# EAGLE board 14049-TSH82_Configurable_Op_Amp_Board-Panel (EAGLE 9.1.0), part 1 of 8
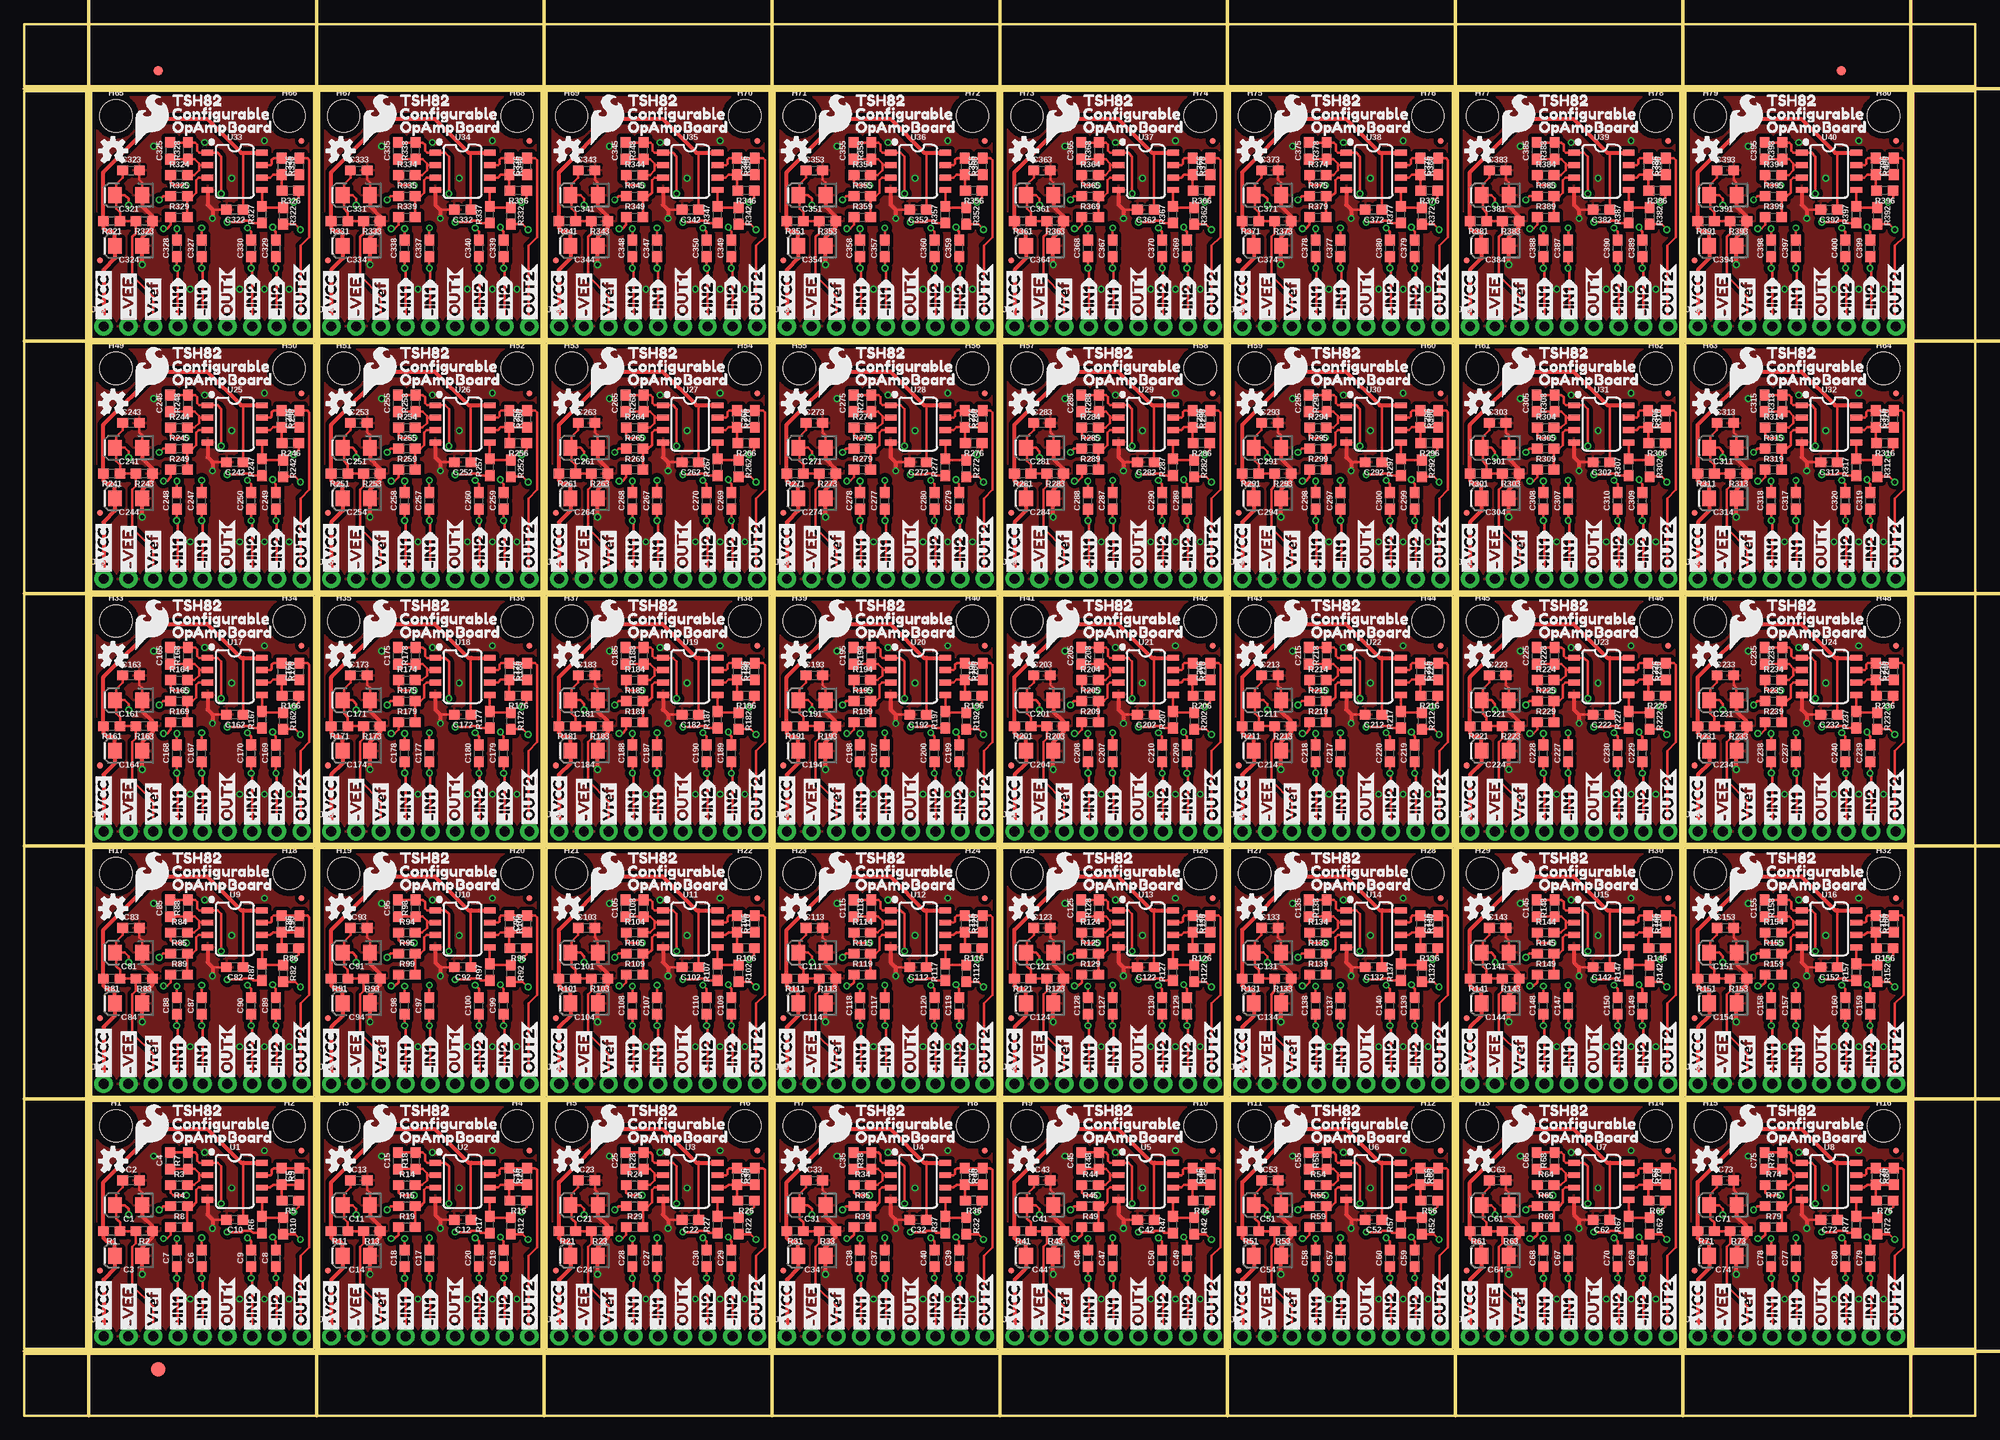
[diagram p0: board, top side]
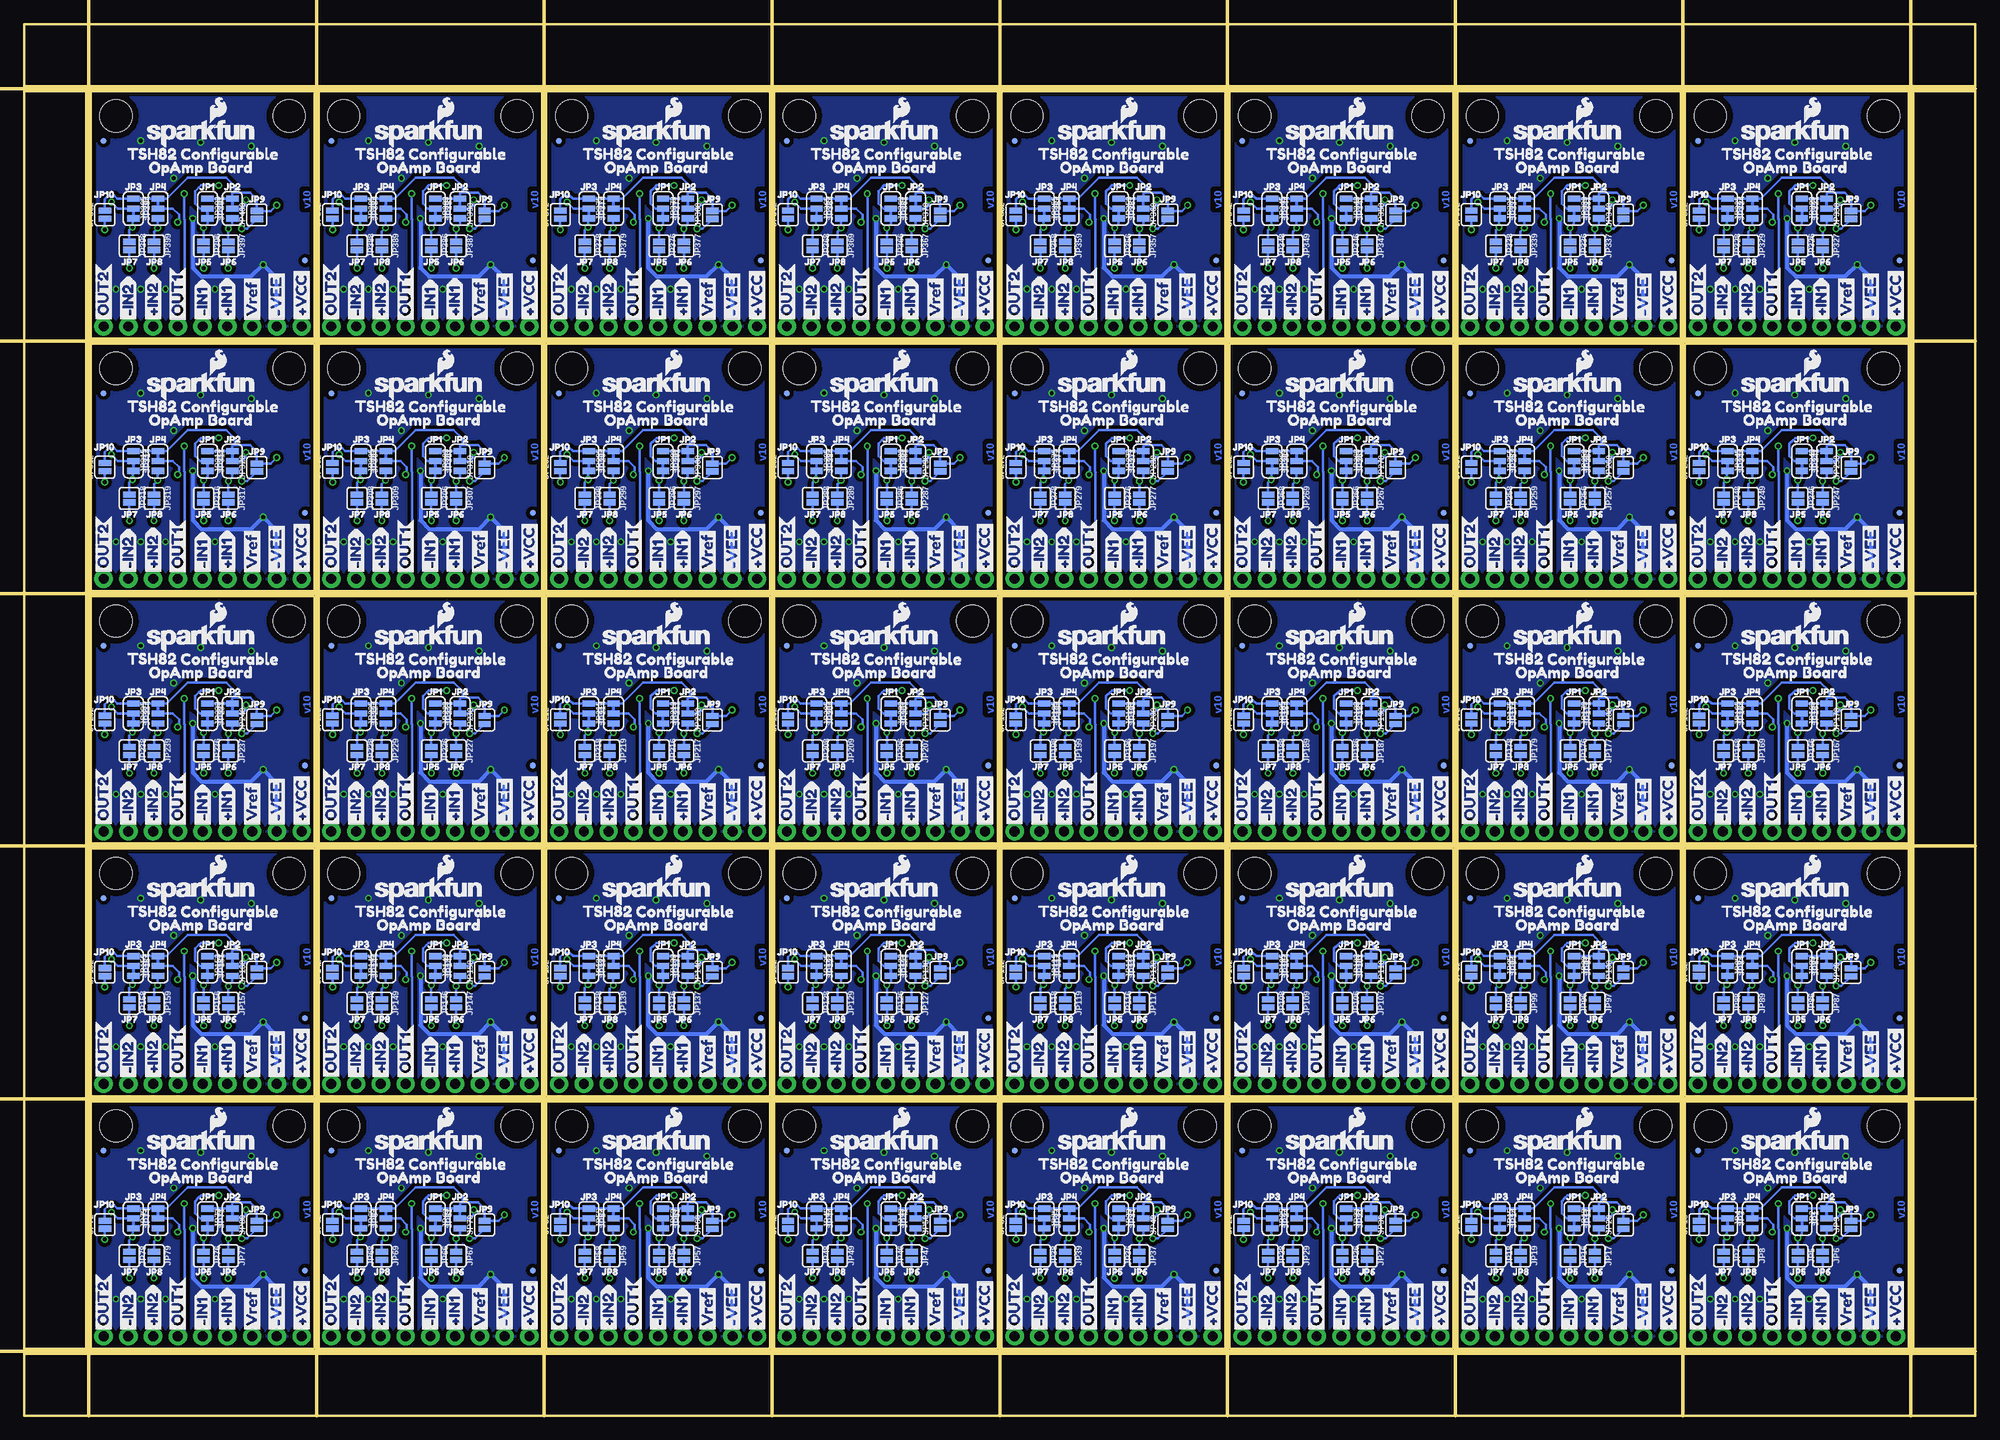
[diagram p1: board, bottom side, seen from below]

Size 200.15 x 142.75 mm. Coordinates in mm from the lower left corner, seen from the top.
Outline: 6.86,6.86 29.72,6.86 29.72,32.26 6.86,32.26 6.86,6.86
Outline: 30.23,6.86 53.09,6.86 53.09,32.26 30.23,32.26 30.23,6.86
Outline: 53.59,6.86 76.45,6.86 76.45,32.26 53.59,32.26 53.59,6.86
Outline: 76.96,6.86 99.82,6.86 99.82,32.26 76.96,32.26 76.96,6.86
Outline: 100.33,6.86 123.19,6.86 123.19,32.26 100.33,32.26 100.33,6.86
Outline: 123.7,6.86 146.56,6.86 146.56,32.26 123.7,32.26 123.7,6.86
Outline: 147.07,6.86 169.93,6.86 169.93,32.26 147.07,32.26 147.07,6.86
Outline: 170.43,6.86 193.29,6.86 193.29,32.26 170.43,32.26 170.43,6.86
Outline: 6.86,32.77 29.72,32.77 29.72,58.17 6.86,58.17 6.86,32.77
Outline: 30.23,32.77 53.09,32.77 53.09,58.17 30.23,58.17 30.23,32.77
Outline: 53.59,32.77 76.45,32.77 76.45,58.17 53.59,58.17 53.59,32.77
Outline: 76.96,32.77 99.82,32.77 99.82,58.17 76.96,58.17 76.96,32.77
Outline: 100.33,32.77 123.19,32.77 123.19,58.17 100.33,58.17 100.33,32.77
Outline: 123.7,32.77 146.56,32.77 146.56,58.17 123.7,58.17 123.7,32.77
Outline: 147.07,32.77 169.93,32.77 169.93,58.17 147.07,58.17 147.07,32.77
Outline: 170.43,32.77 193.29,32.77 193.29,58.17 170.43,58.17 170.43,32.77
Outline: 6.86,58.67 29.72,58.67 29.72,84.07 6.86,84.07 6.86,58.67
Outline: 30.23,58.67 53.09,58.67 53.09,84.07 30.23,84.07 30.23,58.67
Outline: 53.59,58.67 76.45,58.67 76.45,84.07 53.59,84.07 53.59,58.67
Outline: 76.96,58.67 99.82,58.67 99.82,84.07 76.96,84.07 76.96,58.67
Outline: 100.33,58.67 123.19,58.67 123.19,84.07 100.33,84.07 100.33,58.67
Outline: 123.7,58.67 146.56,58.67 146.56,84.07 123.7,84.07 123.7,58.67
Outline: 147.07,58.67 169.93,58.67 169.93,84.07 147.07,84.07 147.07,58.67
Outline: 170.43,58.67 193.29,58.67 193.29,84.07 170.43,84.07 170.43,58.67
Outline: 6.86,84.58 29.72,84.58 29.72,109.98 6.86,109.98 6.86,84.58
Outline: 30.23,84.58 53.09,84.58 53.09,109.98 30.23,109.98 30.23,84.58
Outline: 53.59,84.58 76.45,84.58 76.45,109.98 53.59,109.98 53.59,84.58
Outline: 76.96,84.58 99.82,84.58 99.82,109.98 76.96,109.98 76.96,84.58
Outline: 100.33,84.58 123.19,84.58 123.19,109.98 100.33,109.98 100.33,84.58
Outline: 123.7,84.58 146.56,84.58 146.56,109.98 123.7,109.98 123.7,84.58
Outline: 147.07,84.58 169.93,84.58 169.93,109.98 147.07,109.98 147.07,84.58
Outline: 170.43,84.58 193.29,84.58 193.29,109.98 170.43,109.98 170.43,84.58
Outline: 6.86,110.49 29.72,110.49 29.72,135.89 6.86,135.89 6.86,110.49
Outline: 30.23,110.49 53.09,110.49 53.09,135.89 30.23,135.89 30.23,110.49
Outline: 53.59,110.49 76.45,110.49 76.45,135.89 53.59,135.89 53.59,110.49
Outline: 76.96,110.49 99.82,110.49 99.82,135.89 76.96,135.89 76.96,110.49
Outline: 100.33,110.49 123.19,110.49 123.19,135.89 100.33,135.89 100.33,110.49
Outline: 123.7,110.49 146.56,110.49 146.56,135.89 123.7,135.89 123.7,110.49
Outline: 147.07,110.49 169.93,110.49 169.93,135.89 147.07,135.89 147.07,110.49
Outline: 170.43,110.49 193.29,110.49 193.29,135.89 170.43,135.89 170.43,110.49
Outline: 0,6.35 200.15,6.35 200.15,0 0,0 0,6.35
Outline: 193.8,135.89 200.15,135.89 200.15,6.86 193.8,6.86 193.8,135.89
Outline: 0,142.75 200.15,142.75 200.15,136.4 0,136.4 0,142.75
Outline: 0,135.89 6.35,135.89 6.35,6.86 0,6.86 0,135.89
Copper layers (1*16): Top 0.035mm / dielectric 1.5mm / Bottom 0.035mm
Design rules "SparkFun-2-layer-PCBWay-LIMIT": minimum track width 6mil, minimum drill 0.3mm, track to track 6mil, track to pad 6mil, pad to pad 6mil, via to via 6mil, smd to smd 6mil, copper to edge 6mil, drill to drill 6mil, minimum pad ring 6mil, minimum via ring 6mil, stop-mask expansion 4mil, vias tented up to drill 25mil, thermal gap 10mil
Milling: 15 lines

## Footprints (pad centres in the part's own frame; a part is rotated, then mirrored left to right if it is on the bottom)
EIA3216 = smd 1.4 x 1.6: + 1.4,0; - -1.4,0
0603 = smd 1.1 x 1: 1 -0.85,0; 2 0.85,0
FIDUCIAL-1X2 = smd 1 x 1: 1 0,0
FIDUCIAL-1.5X3 = smd 1.5 x 1.5: 1 0,0
FIDUCIAL-MICRO = smd 0.635 x 0.635: 1 0,0
STAND-OFF = hole 3.302: 0,0
1X09_NO_SILK = drill 1.016 pad 1.88: 1 0,0; 2 2.54,0; 3 5.08,0; 4 7.62,0; 5 10.16,0; 6 12.7,0; 7 15.24,0; 8 17.78,0; 9 20.32,0
SMT-JUMPER_3_1-NC_TRACE_SILK = smd 0.635 x 1.27: 1 -1.016,0; 2 0,0; 3 1.016,0
SMT-JUMPER_2_NO_SILK = smd 0.635 x 1.27: 1 -0.406,0; 2 0.406,0
SO08 = smd 0.6 x 1.2: 1 -1.905,-2.8; 2 -0.635,-2.8; 3 0.635,-2.8; 4 1.905,-2.8; 5 1.905,2.8; 6 0.635,2.8; 7 -0.635,2.8; 8 -1.905,2.8

## Placement (x,y rotation side)
C1  10uF  [EIA3216]  10.69,21.59 180 top
C2  0.1uF  [0603]  10.95,24.13 0 top
C3  10uF  [EIA3216]  10.69,16.38 180 top
C4  DNP  [0603]  14.96,26.14 90 top
C5  DNP  [0603]  28.22,24.54 90 top
C6  1.0uF  [0603]  18.19,16.13 90 top
C7  1.0uF  [0603]  15.65,16.13 90 top
C8  1.0uF  [0603]  25.81,16.13 90 top
C9  1.0uF  [0603]  23.27,16.13 90 top
C10  0.1uF  [0603]  21.59,20.09 180 top
C11  10uF  [EIA3216]  34.06,21.59 180 top
C12  0.1uF  [0603]  44.96,20.09 180 top
C13  0.1uF  [0603]  34.32,24.13 0 top
C14  10uF  [EIA3216]  34.06,16.38 180 top
C15  DNP  [0603]  38.33,26.14 90 top
C16  DNP  [0603]  51.59,24.54 90 top
C17  1.0uF  [0603]  41.55,16.13 90 top
C18  1.0uF  [0603]  39.01,16.13 90 top
C19  1.0uF  [0603]  49.17,16.13 90 top
C20  1.0uF  [0603]  46.63,16.13 90 top
C21  10uF  [EIA3216]  57.43,21.59 180 top
C22  0.1uF  [0603]  68.33,20.09 180 top
C23  0.1uF  [0603]  57.68,24.13 0 top
C24  10uF  [EIA3216]  57.43,16.38 180 top
C25  DNP  [0603]  61.7,26.14 90 top
C26  DNP  [0603]  74.96,24.54 90 top
C27  1.0uF  [0603]  64.92,16.13 90 top
C28  1.0uF  [0603]  62.38,16.13 90 top
C29  1.0uF  [0603]  72.54,16.13 90 top
C30  1.0uF  [0603]  70,16.13 90 top
C31  10uF  [EIA3216]  80.8,21.59 180 top
C32  0.1uF  [0603]  91.69,20.09 180 top
C33  0.1uF  [0603]  81.05,24.13 0 top
C34  10uF  [EIA3216]  80.8,16.38 180 top
C35  DNP  [0603]  85.06,26.14 90 top
C36  DNP  [0603]  98.32,24.54 90 top
C37  1.0uF  [0603]  88.29,16.13 90 top
C38  1.0uF  [0603]  85.75,16.13 90 top
C39  1.0uF  [0603]  95.91,16.13 90 top
C40  1.0uF  [0603]  93.37,16.13 90 top
C41  10uF  [EIA3216]  104.17,21.59 180 top
C42  0.1uF  [0603]  115.06,20.09 180 top
C43  0.1uF  [0603]  104.42,24.13 0 top
C44  10uF  [EIA3216]  104.17,16.38 180 top
C45  DNP  [0603]  108.43,26.14 90 top
C46  DNP  [0603]  121.69,24.54 90 top
C47  1.0uF  [0603]  111.66,16.13 90 top
C48  1.0uF  [0603]  109.12,16.13 90 top
C49  1.0uF  [0603]  119.28,16.13 90 top
C50  1.0uF  [0603]  116.74,16.13 90 top
C51  10uF  [EIA3216]  127.53,21.59 180 top
C52  0.1uF  [0603]  138.43,20.09 180 top
C53  0.1uF  [0603]  127.79,24.13 0 top
C54  10uF  [EIA3216]  127.53,16.38 180 top
C55  DNP  [0603]  131.8,26.14 90 top
C56  DNP  [0603]  145.06,24.54 90 top
C57  1.0uF  [0603]  135.03,16.13 90 top
C58  1.0uF  [0603]  132.49,16.13 90 top
C59  1.0uF  [0603]  142.65,16.13 90 top
C60  1.0uF  [0603]  140.11,16.13 90 top
C61  10uF  [EIA3216]  150.9,21.59 180 top
C62  0.1uF  [0603]  161.8,20.09 180 top
C63  0.1uF  [0603]  151.16,24.13 0 top
C64  10uF  [EIA3216]  150.9,16.38 180 top
C65  DNP  [0603]  155.17,26.14 90 top
C66  DNP  [0603]  168.43,24.54 90 top
C67  1.0uF  [0603]  158.39,16.13 90 top
C68  1.0uF  [0603]  155.85,16.13 90 top
C69  1.0uF  [0603]  166.01,16.13 90 top
C70  1.0uF  [0603]  163.47,16.13 90 top
C71  10uF  [EIA3216]  174.27,21.59 180 top
C72  0.1uF  [0603]  185.17,20.09 180 top
C73  0.1uF  [0603]  174.52,24.13 0 top
C74  10uF  [EIA3216]  174.27,16.38 180 top
C75  DNP  [0603]  178.54,26.14 90 top
C76  DNP  [0603]  191.8,24.54 90 top
C77  1.0uF  [0603]  181.76,16.13 90 top
C78  1.0uF  [0603]  179.22,16.13 90 top
C79  1.0uF  [0603]  189.38,16.13 90 top
C80  1.0uF  [0603]  186.84,16.13 90 top
C81  10uF  [EIA3216]  10.69,47.5 180 top
C82  0.1uF  [0603]  21.59,46 180 top
C83  0.1uF  [0603]  10.95,50.04 0 top
C84  10uF  [EIA3216]  10.69,42.29 180 top
C85  DNP  [0603]  14.96,52.04 90 top
C86  DNP  [0603]  28.22,50.44 90 top
C87  1.0uF  [0603]  18.19,42.04 90 top
C88  1.0uF  [0603]  15.65,42.04 90 top
C89  1.0uF  [0603]  25.81,42.04 90 top
C90  1.0uF  [0603]  23.27,42.04 90 top
C91  10uF  [EIA3216]  34.06,47.5 180 top
C92  0.1uF  [0603]  44.96,46 180 top
C93  0.1uF  [0603]  34.32,50.04 0 top
C94  10uF  [EIA3216]  34.06,42.29 180 top
C95  DNP  [0603]  38.33,52.04 90 top
C96  DNP  [0603]  51.59,50.44 90 top
C97  1.0uF  [0603]  41.55,42.04 90 top
C98  1.0uF  [0603]  39.01,42.04 90 top
C99  1.0uF  [0603]  49.17,42.04 90 top
C100  1.0uF  [0603]  46.63,42.04 90 top
C101  10uF  [EIA3216]  57.43,47.5 180 top
C102  0.1uF  [0603]  68.33,46 180 top
C103  0.1uF  [0603]  57.68,50.04 0 top
C104  10uF  [EIA3216]  57.43,42.29 180 top
C105  DNP  [0603]  61.7,52.04 90 top
C106  DNP  [0603]  74.96,50.44 90 top
C107  1.0uF  [0603]  64.92,42.04 90 top
C108  1.0uF  [0603]  62.38,42.04 90 top
C109  1.0uF  [0603]  72.54,42.04 90 top
C110  1.0uF  [0603]  70,42.04 90 top
C111  10uF  [EIA3216]  80.8,47.5 180 top
C112  0.1uF  [0603]  91.69,46 180 top
C113  0.1uF  [0603]  81.05,50.04 0 top
C114  10uF  [EIA3216]  80.8,42.29 180 top
C115  DNP  [0603]  85.06,52.04 90 top
C116  DNP  [0603]  98.32,50.44 90 top
C117  1.0uF  [0603]  88.29,42.04 90 top
C118  1.0uF  [0603]  85.75,42.04 90 top
C119  1.0uF  [0603]  95.91,42.04 90 top
C120  1.0uF  [0603]  93.37,42.04 90 top
C121  10uF  [EIA3216]  104.17,47.5 180 top
C122  0.1uF  [0603]  115.06,46 180 top
C123  0.1uF  [0603]  104.42,50.04 0 top
C124  10uF  [EIA3216]  104.17,42.29 180 top
C125  DNP  [0603]  108.43,52.04 90 top
C126  DNP  [0603]  121.69,50.44 90 top
C127  1.0uF  [0603]  111.66,42.04 90 top
C128  1.0uF  [0603]  109.12,42.04 90 top
C129  1.0uF  [0603]  119.28,42.04 90 top
C130  1.0uF  [0603]  116.74,42.04 90 top
C131  10uF  [EIA3216]  127.53,47.5 180 top
C132  0.1uF  [0603]  138.43,46 180 top
C133  0.1uF  [0603]  127.79,50.04 0 top
C134  10uF  [EIA3216]  127.53,42.29 180 top
C135  DNP  [0603]  131.8,52.04 90 top
C136  DNP  [0603]  145.06,50.44 90 top
C137  1.0uF  [0603]  135.03,42.04 90 top
C138  1.0uF  [0603]  132.49,42.04 90 top
C139  1.0uF  [0603]  142.65,42.04 90 top
C140  1.0uF  [0603]  140.11,42.04 90 top
C141  10uF  [EIA3216]  150.9,47.5 180 top
C142  0.1uF  [0603]  161.8,46 180 top
C143  0.1uF  [0603]  151.16,50.04 0 top
C144  10uF  [EIA3216]  150.9,42.29 180 top
C145  DNP  [0603]  155.17,52.04 90 top
C146  DNP  [0603]  168.43,50.44 90 top
C147  1.0uF  [0603]  158.39,42.04 90 top
C148  1.0uF  [0603]  155.85,42.04 90 top
C149  1.0uF  [0603]  166.01,42.04 90 top
C150  1.0uF  [0603]  163.47,42.04 90 top
C151  10uF  [EIA3216]  174.27,47.5 180 top
C152  0.1uF  [0603]  185.17,46 180 top
C153  0.1uF  [0603]  174.52,50.04 0 top
C154  10uF  [EIA3216]  174.27,42.29 180 top
C155  DNP  [0603]  178.54,52.04 90 top
C156  DNP  [0603]  191.8,50.44 90 top
C157  1.0uF  [0603]  181.76,42.04 90 top
C158  1.0uF  [0603]  179.22,42.04 90 top
C159  1.0uF  [0603]  189.38,42.04 90 top
C160  1.0uF  [0603]  186.84,42.04 90 top
C161  10uF  [EIA3216]  10.69,73.41 180 top
C162  0.1uF  [0603]  21.59,71.91 180 top
C163  0.1uF  [0603]  10.95,75.95 0 top
C164  10uF  [EIA3216]  10.69,68.2 180 top
C165  DNP  [0603]  14.96,77.95 90 top
C166  DNP  [0603]  28.22,76.35 90 top
C167  1.0uF  [0603]  18.19,67.95 90 top
C168  1.0uF  [0603]  15.65,67.95 90 top
C169  1.0uF  [0603]  25.81,67.95 90 top
C170  1.0uF  [0603]  23.27,67.95 90 top
C171  10uF  [EIA3216]  34.06,73.41 180 top
C172  0.1uF  [0603]  44.96,71.91 180 top
C173  0.1uF  [0603]  34.32,75.95 0 top
C174  10uF  [EIA3216]  34.06,68.2 180 top
C175  DNP  [0603]  38.33,77.95 90 top
C176  DNP  [0603]  51.59,76.35 90 top
C177  1.0uF  [0603]  41.55,67.95 90 top
C178  1.0uF  [0603]  39.01,67.95 90 top
C179  1.0uF  [0603]  49.17,67.95 90 top
C180  1.0uF  [0603]  46.63,67.95 90 top
C181  10uF  [EIA3216]  57.43,73.41 180 top
C182  0.1uF  [0603]  68.33,71.91 180 top
C183  0.1uF  [0603]  57.68,75.95 0 top
C184  10uF  [EIA3216]  57.43,68.2 180 top
C185  DNP  [0603]  61.7,77.95 90 top
C186  DNP  [0603]  74.96,76.35 90 top
C187  1.0uF  [0603]  64.92,67.95 90 top
C188  1.0uF  [0603]  62.38,67.95 90 top
C189  1.0uF  [0603]  72.54,67.95 90 top
C190  1.0uF  [0603]  70,67.95 90 top
C191  10uF  [EIA3216]  80.8,73.41 180 top
C192  0.1uF  [0603]  91.69,71.91 180 top
C193  0.1uF  [0603]  81.05,75.95 0 top
C194  10uF  [EIA3216]  80.8,68.2 180 top
C195  DNP  [0603]  85.06,77.95 90 top
C196  DNP  [0603]  98.32,76.35 90 top
C197  1.0uF  [0603]  88.29,67.95 90 top
C198  1.0uF  [0603]  85.75,67.95 90 top
C199  1.0uF  [0603]  95.91,67.95 90 top
C200  1.0uF  [0603]  93.37,67.95 90 top
C201  10uF  [EIA3216]  104.17,73.41 180 top
C202  0.1uF  [0603]  115.06,71.91 180 top
C203  0.1uF  [0603]  104.42,75.95 0 top
C204  10uF  [EIA3216]  104.17,68.2 180 top
C205  DNP  [0603]  108.43,77.95 90 top
C206  DNP  [0603]  121.69,76.35 90 top
C207  1.0uF  [0603]  111.66,67.95 90 top
C208  1.0uF  [0603]  109.12,67.95 90 top
C209  1.0uF  [0603]  119.28,67.95 90 top
C210  1.0uF  [0603]  116.74,67.95 90 top
C211  10uF  [EIA3216]  127.53,73.41 180 top
C212  0.1uF  [0603]  138.43,71.91 180 top
C213  0.1uF  [0603]  127.79,75.95 0 top
C214  10uF  [EIA3216]  127.53,68.2 180 top
C215  DNP  [0603]  131.8,77.95 90 top
C216  DNP  [0603]  145.06,76.35 90 top
C217  1.0uF  [0603]  135.03,67.95 90 top
C218  1.0uF  [0603]  132.49,67.95 90 top
C219  1.0uF  [0603]  142.65,67.95 90 top
C220  1.0uF  [0603]  140.11,67.95 90 top
C221  10uF  [EIA3216]  150.9,73.41 180 top
C222  0.1uF  [0603]  161.8,71.91 180 top
C223  0.1uF  [0603]  151.16,75.95 0 top
C224  10uF  [EIA3216]  150.9,68.2 180 top
C225  DNP  [0603]  155.17,77.95 90 top
C226  DNP  [0603]  168.43,76.35 90 top
C227  1.0uF  [0603]  158.39,67.95 90 top
C228  1.0uF  [0603]  155.85,67.95 90 top
C229  1.0uF  [0603]  166.01,67.95 90 top
C230  1.0uF  [0603]  163.47,67.95 90 top
C231  10uF  [EIA3216]  174.27,73.41 180 top
C232  0.1uF  [0603]  185.17,71.91 180 top
C233  0.1uF  [0603]  174.52,75.95 0 top
C234  10uF  [EIA3216]  174.27,68.2 180 top
C235  DNP  [0603]  178.54,77.95 90 top
C236  DNP  [0603]  191.8,76.35 90 top
C237  1.0uF  [0603]  181.76,67.95 90 top
C238  1.0uF  [0603]  179.22,67.95 90 top
C239  1.0uF  [0603]  189.38,67.95 90 top
C240  1.0uF  [0603]  186.84,67.95 90 top
C241  10uF  [EIA3216]  10.69,99.31 180 top
C242  0.1uF  [0603]  21.59,97.82 180 top
C243  0.1uF  [0603]  10.95,101.85 0 top
C244  10uF  [EIA3216]  10.69,94.11 180 top
C245  DNP  [0603]  14.96,103.86 90 top
C246  DNP  [0603]  28.22,102.26 90 top
C247  1.0uF  [0603]  18.19,93.85 90 top
C248  1.0uF  [0603]  15.65,93.85 90 top
C249  1.0uF  [0603]  25.81,93.85 90 top
C250  1.0uF  [0603]  23.27,93.85 90 top
C251  10uF  [EIA3216]  34.06,99.31 180 top
C252  0.1uF  [0603]  44.96,97.82 180 top
C253  0.1uF  [0603]  34.32,101.85 0 top
C254  10uF  [EIA3216]  34.06,94.11 180 top
C255  DNP  [0603]  38.33,103.86 90 top
C256  DNP  [0603]  51.59,102.26 90 top
C257  1.0uF  [0603]  41.55,93.85 90 top
C258  1.0uF  [0603]  39.01,93.85 90 top
C259  1.0uF  [0603]  49.17,93.85 90 top
C260  1.0uF  [0603]  46.63,93.85 90 top
C261  10uF  [EIA3216]  57.43,99.31 180 top
C262  0.1uF  [0603]  68.33,97.82 180 top
C263  0.1uF  [0603]  57.68,101.85 0 top
C264  10uF  [EIA3216]  57.43,94.11 180 top
C265  DNP  [0603]  61.7,103.86 90 top
C266  DNP  [0603]  74.96,102.26 90 top
C267  1.0uF  [0603]  64.92,93.85 90 top
C268  1.0uF  [0603]  62.38,93.85 90 top
C269  1.0uF  [0603]  72.54,93.85 90 top
C270  1.0uF  [0603]  70,93.85 90 top
C271  10uF  [EIA3216]  80.8,99.31 180 top
C272  0.1uF  [0603]  91.69,97.82 180 top
C273  0.1uF  [0603]  81.05,101.85 0 top
C274  10uF  [EIA3216]  80.8,94.11 180 top
C275  DNP  [0603]  85.06,103.86 90 top
C276  DNP  [0603]  98.32,102.26 90 top
C277  1.0uF  [0603]  88.29,93.85 90 top
C278  1.0uF  [0603]  85.75,93.85 90 top
C279  1.0uF  [0603]  95.91,93.85 90 top
C280  1.0uF  [0603]  93.37,93.85 90 top
C281  10uF  [EIA3216]  104.17,99.31 180 top
C282  0.1uF  [0603]  115.06,97.82 180 top
C283  0.1uF  [0603]  104.42,101.85 0 top
C284  10uF  [EIA3216]  104.17,94.11 180 top
C285  DNP  [0603]  108.43,103.86 90 top
C286  DNP  [0603]  121.69,102.26 90 top
C287  1.0uF  [0603]  111.66,93.85 90 top
C288  1.0uF  [0603]  109.12,93.85 90 top
C289  1.0uF  [0603]  119.28,93.85 90 top
C290  1.0uF  [0603]  116.74,93.85 90 top
C291  10uF  [EIA3216]  127.53,99.31 180 top
C292  0.1uF  [0603]  138.43,97.82 180 top
C293  0.1uF  [0603]  127.79,101.85 0 top
C294  10uF  [EIA3216]  127.53,94.11 180 top
C295  DNP  [0603]  131.8,103.86 90 top
C296  DNP  [0603]  145.06,102.26 90 top
C297  1.0uF  [0603]  135.03,93.85 90 top
C298  1.0uF  [0603]  132.49,93.85 90 top
C299  1.0uF  [0603]  142.65,93.85 90 top
C300  1.0uF  [0603]  140.11,93.85 90 top
C301  10uF  [EIA3216]  150.9,99.31 180 top
C302  0.1uF  [0603]  161.8,97.82 180 top
C303  0.1uF  [0603]  151.16,101.85 0 top
C304  10uF  [EIA3216]  150.9,94.11 180 top
C305  DNP  [0603]  155.17,103.86 90 top
C306  DNP  [0603]  168.43,102.26 90 top
C307  1.0uF  [0603]  158.39,93.85 90 top
C308  1.0uF  [0603]  155.85,93.85 90 top
C309  1.0uF  [0603]  166.01,93.85 90 top
C310  1.0uF  [0603]  163.47,93.85 90 top
C311  10uF  [EIA3216]  174.27,99.31 180 top
C312  0.1uF  [0603]  185.17,97.82 180 top
C313  0.1uF  [0603]  174.52,101.85 0 top
C314  10uF  [EIA3216]  174.27,94.11 180 top
C315  DNP  [0603]  178.54,103.86 90 top
C316  DNP  [0603]  191.8,102.26 90 top
C317  1.0uF  [0603]  181.76,93.85 90 top
C318  1.0uF  [0603]  179.22,93.85 90 top
C319  1.0uF  [0603]  189.38,93.85 90 top
C320  1.0uF  [0603]  186.84,93.85 90 top
C321  10uF  [EIA3216]  10.69,125.22 180 top
C322  0.1uF  [0603]  21.59,123.72 180 top
C323  0.1uF  [0603]  10.95,127.76 0 top
C324  10uF  [EIA3216]  10.69,120.02 180 top
C325  DNP  [0603]  14.96,129.77 90 top
C326  DNP  [0603]  28.22,128.17 90 top
C327  1.0uF  [0603]  18.19,119.76 90 top
C328  1.0uF  [0603]  15.65,119.76 90 top
C329  1.0uF  [0603]  25.81,119.76 90 top
C330  1.0uF  [0603]  23.27,119.76 90 top
C331  10uF  [EIA3216]  34.06,125.22 180 top
C332  0.1uF  [0603]  44.96,123.72 180 top
C333  0.1uF  [0603]  34.32,127.76 0 top
C334  10uF  [EIA3216]  34.06,120.02 180 top
C335  DNP  [0603]  38.33,129.77 90 top
C336  DNP  [0603]  51.59,128.17 90 top
C337  1.0uF  [0603]  41.55,119.76 90 top
C338  1.0uF  [0603]  39.01,119.76 90 top
C339  1.0uF  [0603]  49.17,119.76 90 top
C340  1.0uF  [0603]  46.63,119.76 90 top
C341  10uF  [EIA3216]  57.43,125.22 180 top
C342  0.1uF  [0603]  68.33,123.72 180 top
C343  0.1uF  [0603]  57.68,127.76 0 top
C344  10uF  [EIA3216]  57.43,120.02 180 top
C345  DNP  [0603]  61.7,129.77 90 top
C346  DNP  [0603]  74.96,128.17 90 top
C347  1.0uF  [0603]  64.92,119.76 90 top
C348  1.0uF  [0603]  62.38,119.76 90 top
C349  1.0uF  [0603]  72.54,119.76 90 top
C350  1.0uF  [0603]  70,119.76 90 top
C351  10uF  [EIA3216]  80.8,125.22 180 top
C352  0.1uF  [0603]  91.69,123.72 180 top
C353  0.1uF  [0603]  81.05,127.76 0 top
C354  10uF  [EIA3216]  80.8,120.02 180 top
C355  DNP  [0603]  85.06,129.77 90 top
C356  DNP  [0603]  98.32,128.17 90 top
C357  1.0uF  [0603]  88.29,119.76 90 top
C358  1.0uF  [0603]  85.75,119.76 90 top
C359  1.0uF  [0603]  95.91,119.76 90 top
C360  1.0uF  [0603]  93.37,119.76 90 top
C361  10uF  [EIA3216]  104.17,125.22 180 top
C362  0.1uF  [0603]  115.06,123.72 180 top
C363  0.1uF  [0603]  104.42,127.76 0 top
C364  10uF  [EIA3216]  104.17,120.02 180 top
C365  DNP  [0603]  108.43,129.77 90 top
C366  DNP  [0603]  121.69,128.17 90 top
C367  1.0uF  [0603]  111.66,119.76 90 top
C368  1.0uF  [0603]  109.12,119.76 90 top
C369  1.0uF  [0603]  119.28,119.76 90 top
C370  1.0uF  [0603]  116.74,119.76 90 top
C371  10uF  [EIA3216]  127.53,125.22 180 top
C372  0.1uF  [0603]  138.43,123.72 180 top
C373  0.1uF  [0603]  127.79,127.76 0 top
C374  10uF  [EIA3216]  127.53,120.02 180 top
C375  DNP  [0603]  131.8,129.77 90 top
C376  DNP  [0603]  145.06,128.17 90 top
C377  1.0uF  [0603]  135.03,119.76 90 top
C378  1.0uF  [0603]  132.49,119.76 90 top
C379  1.0uF  [0603]  142.65,119.76 90 top
C380  1.0uF  [0603]  140.11,119.76 90 top
C381  10uF  [EIA3216]  150.9,125.22 180 top
C382  0.1uF  [0603]  161.8,123.72 180 top
C383  0.1uF  [0603]  151.16,127.76 0 top
C384  10uF  [EIA3216]  150.9,120.02 180 top
C385  DNP  [0603]  155.17,129.77 90 top
C386  DNP  [0603]  168.43,128.17 90 top
C387  1.0uF  [0603]  158.39,119.76 90 top
C388  1.0uF  [0603]  155.85,119.76 90 top
C389  1.0uF  [0603]  166.01,119.76 90 top
C390  1.0uF  [0603]  163.47,119.76 90 top
C391  10uF  [EIA3216]  174.27,125.22 180 top
C392  0.1uF  [0603]  185.17,123.72 180 top
C393  0.1uF  [0603]  174.52,127.76 0 top
C394  10uF  [EIA3216]  174.27,120.02 180 top
C395  DNP  [0603]  178.54,129.77 90 top
C396  DNP  [0603]  191.8,128.17 90 top
C397  1.0uF  [0603]  181.76,119.76 90 top
C398  1.0uF  [0603]  179.22,119.76 90 top
C399  1.0uF  [0603]  189.38,119.76 90 top
C400  1.0uF  [0603]  186.84,119.76 90 top
E$1  [FIDUCIAL-1X2]  13.72,137.99 0 top
E$2  [FIDUCIAL-1X2]  186.44,137.99 0 top
E$3  [FIDUCIAL-1.5X3]  13.72,4.76 0 top
FD1  FIDUCIALUFIDUCIAL  [FIDUCIAL-MICRO]  28.45,27.18 0 top
FD2  FIDUCIALUFIDUCIAL  [FIDUCIAL-MICRO]  7.77,14.88 0 top
FD3  FIDUCIALUFIDUCIAL  [FIDUCIAL-MICRO]  7.77,14.88 0 bottom
FD4  FIDUCIALUFIDUCIAL  [FIDUCIAL-MICRO]  28.45,27.18 0 bottom
FD5  FIDUCIALUFIDUCIAL  [FIDUCIAL-MICRO]  51.82,27.18 0 top
FD6  FIDUCIALUFIDUCIAL  [FIDUCIAL-MICRO]  31.14,14.88 0 top
FD7  FIDUCIALUFIDUCIAL  [FIDUCIAL-MICRO]  31.14,14.88 0 bottom
FD8  FIDUCIALUFIDUCIAL  [FIDUCIAL-MICRO]  51.82,27.18 0 bottom
FD9  FIDUCIALUFIDUCIAL  [FIDUCIAL-MICRO]  75.18,27.18 0 top
FD10  FIDUCIALUFIDUCIAL  [FIDUCIAL-MICRO]  54.51,14.88 0 top
FD11  FIDUCIALUFIDUCIAL  [FIDUCIAL-MICRO]  54.51,14.88 0 bottom
FD12  FIDUCIALUFIDUCIAL  [FIDUCIAL-MICRO]  75.18,27.18 0 bottom
FD13  FIDUCIALUFIDUCIAL  [FIDUCIAL-MICRO]  98.55,27.18 0 top
FD14  FIDUCIALUFIDUCIAL  [FIDUCIAL-MICRO]  77.88,14.88 0 top
FD15  FIDUCIALUFIDUCIAL  [FIDUCIAL-MICRO]  77.88,14.88 0 bottom
FD16  FIDUCIALUFIDUCIAL  [FIDUCIAL-MICRO]  98.55,27.18 0 bottom
FD17  FIDUCIALUFIDUCIAL  [FIDUCIAL-MICRO]  121.92,27.18 0 top
FD18  FIDUCIALUFIDUCIAL  [FIDUCIAL-MICRO]  101.24,14.88 0 top
FD19  FIDUCIALUFIDUCIAL  [FIDUCIAL-MICRO]  101.24,14.88 0 bottom
FD20  FIDUCIALUFIDUCIAL  [FIDUCIAL-MICRO]  121.92,27.18 0 bottom
FD21  FIDUCIALUFIDUCIAL  [FIDUCIAL-MICRO]  145.29,27.18 0 top
FD22  FIDUCIALUFIDUCIAL  [FIDUCIAL-MICRO]  124.61,14.88 0 top
FD23  FIDUCIALUFIDUCIAL  [FIDUCIAL-MICRO]  124.61,14.88 0 bottom
FD24  FIDUCIALUFIDUCIAL  [FIDUCIAL-MICRO]  145.29,27.18 0 bottom
FD25  FIDUCIALUFIDUCIAL  [FIDUCIAL-MICRO]  168.66,27.18 0 top
FD26  FIDUCIALUFIDUCIAL  [FIDUCIAL-MICRO]  147.98,14.88 0 top
FD27  FIDUCIALUFIDUCIAL  [FIDUCIAL-MICRO]  147.98,14.88 0 bottom
FD28  FIDUCIALUFIDUCIAL  [FIDUCIAL-MICRO]  168.66,27.18 0 bottom
FD29  FIDUCIALUFIDUCIAL  [FIDUCIAL-MICRO]  192.02,27.18 0 top
FD30  FIDUCIALUFIDUCIAL  [FIDUCIAL-MICRO]  171.35,14.88 0 top
FD31  FIDUCIALUFIDUCIAL  [FIDUCIAL-MICRO]  171.35,14.88 0 bottom
FD32  FIDUCIALUFIDUCIAL  [FIDUCIAL-MICRO]  192.02,27.18 0 bottom
FD33  FIDUCIALUFIDUCIAL  [FIDUCIAL-MICRO]  28.45,53.09 0 top
FD34  FIDUCIALUFIDUCIAL  [FIDUCIAL-MICRO]  7.77,40.79 0 top
FD35  FIDUCIALUFIDUCIAL  [FIDUCIAL-MICRO]  7.77,40.79 0 bottom
FD36  FIDUCIALUFIDUCIAL  [FIDUCIAL-MICRO]  28.45,53.09 0 bottom
FD37  FIDUCIALUFIDUCIAL  [FIDUCIAL-MICRO]  51.82,53.09 0 top
FD38  FIDUCIALUFIDUCIAL  [FIDUCIAL-MICRO]  31.14,40.79 0 top
FD39  FIDUCIALUFIDUCIAL  [FIDUCIAL-MICRO]  31.14,40.79 0 bottom
FD40  FIDUCIALUFIDUCIAL  [FIDUCIAL-MICRO]  51.82,53.09 0 bottom
FD41  FIDUCIALUFIDUCIAL  [FIDUCIAL-MICRO]  75.18,53.09 0 top
FD42  FIDUCIALUFIDUCIAL  [FIDUCIAL-MICRO]  54.51,40.79 0 top
FD43  FIDUCIALUFIDUCIAL  [FIDUCIAL-MICRO]  54.51,40.79 0 bottom
FD44  FIDUCIALUFIDUCIAL  [FIDUCIAL-MICRO]  75.18,53.09 0 bottom
FD45  FIDUCIALUFIDUCIAL  [FIDUCIAL-MICRO]  98.55,53.09 0 top
FD46  FIDUCIALUFIDUCIAL  [FIDUCIAL-MICRO]  77.88,40.79 0 top
FD47  FIDUCIALUFIDUCIAL  [FIDUCIAL-MICRO]  77.88,40.79 0 bottom
FD48  FIDUCIALUFIDUCIAL  [FIDUCIAL-MICRO]  98.55,53.09 0 bottom
FD49  FIDUCIALUFIDUCIAL  [FIDUCIAL-MICRO]  121.92,53.09 0 top
FD50  FIDUCIALUFIDUCIAL  [FIDUCIAL-MICRO]  101.24,40.79 0 top
FD51  FIDUCIALUFIDUCIAL  [FIDUCIAL-MICRO]  101.24,40.79 0 bottom
FD52  FIDUCIALUFIDUCIAL  [FIDUCIAL-MICRO]  121.92,53.09 0 bottom
FD53  FIDUCIALUFIDUCIAL  [FIDUCIAL-MICRO]  145.29,53.09 0 top
FD54  FIDUCIALUFIDUCIAL  [FIDUCIAL-MICRO]  124.61,40.79 0 top
FD55  FIDUCIALUFIDUCIAL  [FIDUCIAL-MICRO]  124.61,40.79 0 bottom
FD56  FIDUCIALUFIDUCIAL  [FIDUCIAL-MICRO]  145.29,53.09 0 bottom
FD57  FIDUCIALUFIDUCIAL  [FIDUCIAL-MICRO]  168.66,53.09 0 top
FD58  FIDUCIALUFIDUCIAL  [FIDUCIAL-MICRO]  147.98,40.79 0 top
FD59  FIDUCIALUFIDUCIAL  [FIDUCIAL-MICRO]  147.98,40.79 0 bottom
FD60  FIDUCIALUFIDUCIAL  [FIDUCIAL-MICRO]  168.66,53.09 0 bottom
FD61  FIDUCIALUFIDUCIAL  [FIDUCIAL-MICRO]  192.02,53.09 0 top
FD62  FIDUCIALUFIDUCIAL  [FIDUCIAL-MICRO]  171.35,40.79 0 top
FD63  FIDUCIALUFIDUCIAL  [FIDUCIAL-MICRO]  171.35,40.79 0 bottom
FD64  FIDUCIALUFIDUCIAL  [FIDUCIAL-MICRO]  192.02,53.09 0 bottom
FD65  FIDUCIALUFIDUCIAL  [FIDUCIAL-MICRO]  28.45,78.99 0 top
FD66  FIDUCIALUFIDUCIAL  [FIDUCIAL-MICRO]  7.77,66.7 0 top
FD67  FIDUCIALUFIDUCIAL  [FIDUCIAL-MICRO]  7.77,66.7 0 bottom
FD68  FIDUCIALUFIDUCIAL  [FIDUCIAL-MICRO]  28.45,78.99 0 bottom
FD69  FIDUCIALUFIDUCIAL  [FIDUCIAL-MICRO]  51.82,78.99 0 top
FD70  FIDUCIALUFIDUCIAL  [FIDUCIAL-MICRO]  31.14,66.7 0 top
FD71  FIDUCIALUFIDUCIAL  [FIDUCIAL-MICRO]  31.14,66.7 0 bottom
FD72  FIDUCIALUFIDUCIAL  [FIDUCIAL-MICRO]  51.82,78.99 0 bottom
FD73  FIDUCIALUFIDUCIAL  [FIDUCIAL-MICRO]  75.18,78.99 0 top
FD74  FIDUCIALUFIDUCIAL  [FIDUCIAL-MICRO]  54.51,66.7 0 top
FD75  FIDUCIALUFIDUCIAL  [FIDUCIAL-MICRO]  54.51,66.7 0 bottom
FD76  FIDUCIALUFIDUCIAL  [FIDUCIAL-MICRO]  75.18,78.99 0 bottom
FD77  FIDUCIALUFIDUCIAL  [FIDUCIAL-MICRO]  98.55,78.99 0 top
FD78  FIDUCIALUFIDUCIAL  [FIDUCIAL-MICRO]  77.88,66.7 0 top
FD79  FIDUCIALUFIDUCIAL  [FIDUCIAL-MICRO]  77.88,66.7 0 bottom
FD80  FIDUCIALUFIDUCIAL  [FIDUCIAL-MICRO]  98.55,78.99 0 bottom
FD81  FIDUCIALUFIDUCIAL  [FIDUCIAL-MICRO]  121.92,78.99 0 top
FD82  FIDUCIALUFIDUCIAL  [FIDUCIAL-MICRO]  101.24,66.7 0 top
FD83  FIDUCIALUFIDUCIAL  [FIDUCIAL-MICRO]  101.24,66.7 0 bottom
FD84  FIDUCIALUFIDUCIAL  [FIDUCIAL-MICRO]  121.92,78.99 0 bottom
FD85  FIDUCIALUFIDUCIAL  [FIDUCIAL-MICRO]  145.29,78.99 0 top
FD86  FIDUCIALUFIDUCIAL  [FIDUCIAL-MICRO]  124.61,66.7 0 top
FD87  FIDUCIALUFIDUCIAL  [FIDUCIAL-MICRO]  124.61,66.7 0 bottom
FD88  FIDUCIALUFIDUCIAL  [FIDUCIAL-MICRO]  145.29,78.99 0 bottom
FD89  FIDUCIALUFIDUCIAL  [FIDUCIAL-MICRO]  168.66,78.99 0 top
FD90  FIDUCIALUFIDUCIAL  [FIDUCIAL-MICRO]  147.98,66.7 0 top
FD91  FIDUCIALUFIDUCIAL  [FIDUCIAL-MICRO]  147.98,66.7 0 bottom
FD92  FIDUCIALUFIDUCIAL  [FIDUCIAL-MICRO]  168.66,78.99 0 bottom
FD93  FIDUCIALUFIDUCIAL  [FIDUCIAL-MICRO]  192.02,78.99 0 top
FD94  FIDUCIALUFIDUCIAL  [FIDUCIAL-MICRO]  171.35,66.7 0 top
FD95  FIDUCIALUFIDUCIAL  [FIDUCIAL-MICRO]  171.35,66.7 0 bottom
FD96  FIDUCIALUFIDUCIAL  [FIDUCIAL-MICRO]  192.02,78.99 0 bottom
FD97  FIDUCIALUFIDUCIAL  [FIDUCIAL-MICRO]  28.45,104.9 0 top
FD98  FIDUCIALUFIDUCIAL  [FIDUCIAL-MICRO]  7.77,92.61 0 top
FD99  FIDUCIALUFIDUCIAL  [FIDUCIAL-MICRO]  7.77,92.61 0 bottom
FD100  FIDUCIALUFIDUCIAL  [FIDUCIAL-MICRO]  28.45,104.9 0 bottom
FD101  FIDUCIALUFIDUCIAL  [FIDUCIAL-MICRO]  51.82,104.9 0 top
FD102  FIDUCIALUFIDUCIAL  [FIDUCIAL-MICRO]  31.14,92.61 0 top
FD103  FIDUCIALUFIDUCIAL  [FIDUCIAL-MICRO]  31.14,92.61 0 bottom
FD104  FIDUCIALUFIDUCIAL  [FIDUCIAL-MICRO]  51.82,104.9 0 bottom
FD105  FIDUCIALUFIDUCIAL  [FIDUCIAL-MICRO]  75.18,104.9 0 top
FD106  FIDUCIALUFIDUCIAL  [FIDUCIAL-MICRO]  54.51,92.61 0 top
FD107  FIDUCIALUFIDUCIAL  [FIDUCIAL-MICRO]  54.51,92.61 0 bottom
FD108  FIDUCIALUFIDUCIAL  [FIDUCIAL-MICRO]  75.18,104.9 0 bottom
FD109  FIDUCIALUFIDUCIAL  [FIDUCIAL-MICRO]  98.55,104.9 0 top
FD110  FIDUCIALUFIDUCIAL  [FIDUCIAL-MICRO]  77.88,92.61 0 top
FD111  FIDUCIALUFIDUCIAL  [FIDUCIAL-MICRO]  77.88,92.61 0 bottom
FD112  FIDUCIALUFIDUCIAL  [FIDUCIAL-MICRO]  98.55,104.9 0 bottom
FD113  FIDUCIALUFIDUCIAL  [FIDUCIAL-MICRO]  121.92,104.9 0 top
FD114  FIDUCIALUFIDUCIAL  [FIDUCIAL-MICRO]  101.24,92.61 0 top
FD115  FIDUCIALUFIDUCIAL  [FIDUCIAL-MICRO]  101.24,92.61 0 bottom
FD116  FIDUCIALUFIDUCIAL  [FIDUCIAL-MICRO]  121.92,104.9 0 bottom
FD117  FIDUCIALUFIDUCIAL  [FIDUCIAL-MICRO]  145.29,104.9 0 top
FD118  FIDUCIALUFIDUCIAL  [FIDUCIAL-MICRO]  124.61,92.61 0 top
FD119  FIDUCIALUFIDUCIAL  [FIDUCIAL-MICRO]  124.61,92.61 0 bottom
FD120  FIDUCIALUFIDUCIAL  [FIDUCIAL-MICRO]  145.29,104.9 0 bottom
FD121  FIDUCIALUFIDUCIAL  [FIDUCIAL-MICRO]  168.66,104.9 0 top
FD122  FIDUCIALUFIDUCIAL  [FIDUCIAL-MICRO]  147.98,92.61 0 top
FD123  FIDUCIALUFIDUCIAL  [FIDUCIAL-MICRO]  147.98,92.61 0 bottom
FD124  FIDUCIALUFIDUCIAL  [FIDUCIAL-MICRO]  168.66,104.9 0 bottom
FD125  FIDUCIALUFIDUCIAL  [FIDUCIAL-MICRO]  192.02,104.9 0 top
FD126  FIDUCIALUFIDUCIAL  [FIDUCIAL-MICRO]  171.35,92.61 0 top
FD127  FIDUCIALUFIDUCIAL  [FIDUCIAL-MICRO]  171.35,92.61 0 bottom
FD128  FIDUCIALUFIDUCIAL  [FIDUCIAL-MICRO]  192.02,104.9 0 bottom
FD129  FIDUCIALUFIDUCIAL  [FIDUCIAL-MICRO]  28.45,130.81 0 top
FD130  FIDUCIALUFIDUCIAL  [FIDUCIAL-MICRO]  7.77,118.52 0 top
FD131  FIDUCIALUFIDUCIAL  [FIDUCIAL-MICRO]  7.77,118.52 0 bottom
FD132  FIDUCIALUFIDUCIAL  [FIDUCIAL-MICRO]  28.45,130.81 0 bottom
FD133  FIDUCIALUFIDUCIAL  [FIDUCIAL-MICRO]  51.82,130.81 0 top
FD134  FIDUCIALUFIDUCIAL  [FIDUCIAL-MICRO]  31.14,118.52 0 top
FD135  FIDUCIALUFIDUCIAL  [FIDUCIAL-MICRO]  31.14,118.52 0 bottom
FD136  FIDUCIALUFIDUCIAL  [FIDUCIAL-MICRO]  51.82,130.81 0 bottom
FD137  FIDUCIALUFIDUCIAL  [FIDUCIAL-MICRO]  75.18,130.81 0 top
FD138  FIDUCIALUFIDUCIAL  [FIDUCIAL-MICRO]  54.51,118.52 0 top
FD139  FIDUCIALUFIDUCIAL  [FIDUCIAL-MICRO]  54.51,118.52 0 bottom
FD140  FIDUCIALUFIDUCIAL  [FIDUCIAL-MICRO]  75.18,130.81 0 bottom
FD141  FIDUCIALUFIDUCIAL  [FIDUCIAL-MICRO]  98.55,130.81 0 top
FD142  FIDUCIALUFIDUCIAL  [FIDUCIAL-MICRO]  77.88,118.52 0 top
FD143  FIDUCIALUFIDUCIAL  [FIDUCIAL-MICRO]  77.88,118.52 0 bottom
FD144  FIDUCIALUFIDUCIAL  [FIDUCIAL-MICRO]  98.55,130.81 0 bottom
FD145  FIDUCIALUFIDUCIAL  [FIDUCIAL-MICRO]  121.92,130.81 0 top
FD146  FIDUCIALUFIDUCIAL  [FIDUCIAL-MICRO]  101.24,118.52 0 top
FD147  FIDUCIALUFIDUCIAL  [FIDUCIAL-MICRO]  101.24,118.52 0 bottom
FD148  FIDUCIALUFIDUCIAL  [FIDUCIAL-MICRO]  121.92,130.81 0 bottom
FD149  FIDUCIALUFIDUCIAL  [FIDUCIAL-MICRO]  145.29,130.81 0 top
FD150  FIDUCIALUFIDUCIAL  [FIDUCIAL-MICRO]  124.61,118.52 0 top
FD151  FIDUCIALUFIDUCIAL  [FIDUCIAL-MICRO]  124.61,118.52 0 bottom
FD152  FIDUCIALUFIDUCIAL  [FIDUCIAL-MICRO]  145.29,130.81 0 bottom
FD153  FIDUCIALUFIDUCIAL  [FIDUCIAL-MICRO]  168.66,130.81 0 top
FD154  FIDUCIALUFIDUCIAL  [FIDUCIAL-MICRO]  147.98,118.52 0 top
FD155  FIDUCIALUFIDUCIAL  [FIDUCIAL-MICRO]  147.98,118.52 0 bottom
FD156  FIDUCIALUFIDUCIAL  [FIDUCIAL-MICRO]  168.66,130.81 0 bottom
FD157  FIDUCIALUFIDUCIAL  [FIDUCIAL-MICRO]  192.02,130.81 0 top
FD158  FIDUCIALUFIDUCIAL  [FIDUCIAL-MICRO]  171.35,118.52 0 top
FD159  FIDUCIALUFIDUCIAL  [FIDUCIAL-MICRO]  171.35,118.52 0 bottom
FD160  FIDUCIALUFIDUCIAL  [FIDUCIAL-MICRO]  192.02,130.81 0 bottom
H1  STAND-OFF  [STAND-OFF]  9.4,29.72 0 top
H2  STAND-OFF  [STAND-OFF]  27.18,29.72 0 top
H3  STAND-OFF  [STAND-OFF]  32.77,29.72 0 top
H4  STAND-OFF  [STAND-OFF]  50.55,29.72 0 top
H5  STAND-OFF  [STAND-OFF]  56.13,29.72 0 top
H6  STAND-OFF  [STAND-OFF]  73.91,29.72 0 top
H7  STAND-OFF  [STAND-OFF]  79.5,29.72 0 top
H8  STAND-OFF  [STAND-OFF]  97.28,29.72 0 top
H9  STAND-OFF  [STAND-OFF]  102.87,29.72 0 top
H10  STAND-OFF  [STAND-OFF]  120.65,29.72 0 top
H11  STAND-OFF  [STAND-OFF]  126.24,29.72 0 top
H12  STAND-OFF  [STAND-OFF]  144.02,29.72 0 top
H13  STAND-OFF  [STAND-OFF]  149.61,29.72 0 top
H14  STAND-OFF  [STAND-OFF]  167.39,29.72 0 top
H15  STAND-OFF  [STAND-OFF]  172.97,29.72 0 top
H16  STAND-OFF  [STAND-OFF]  190.75,29.72 0 top
H17  STAND-OFF  [STAND-OFF]  9.4,55.63 0 top
H18  STAND-OFF  [STAND-OFF]  27.18,55.63 0 top
H19  STAND-OFF  [STAND-OFF]  32.77,55.63 0 top
H20  STAND-OFF  [STAND-OFF]  50.55,55.63 0 top
H21  STAND-OFF  [STAND-OFF]  56.13,55.63 0 top
H22  STAND-OFF  [STAND-OFF]  73.91,55.63 0 top
H23  STAND-OFF  [STAND-OFF]  79.5,55.63 0 top
H24  STAND-OFF  [STAND-OFF]  97.28,55.63 0 top
H25  STAND-OFF  [STAND-OFF]  102.87,55.63 0 top
H26  STAND-OFF  [STAND-OFF]  120.65,55.63 0 top
H27  STAND-OFF  [STAND-OFF]  126.24,55.63 0 top
H28  STAND-OFF  [STAND-OFF]  144.02,55.63 0 top
H29  STAND-OFF  [STAND-OFF]  149.61,55.63 0 top
H30  STAND-OFF  [STAND-OFF]  167.39,55.63 0 top
H31  STAND-OFF  [STAND-OFF]  172.97,55.63 0 top
H32  STAND-OFF  [STAND-OFF]  190.75,55.63 0 top
H33  STAND-OFF  [STAND-OFF]  9.4,81.53 0 top
H34  STAND-OFF  [STAND-OFF]  27.18,81.53 0 top
H35  STAND-OFF  [STAND-OFF]  32.77,81.53 0 top
H36  STAND-OFF  [STAND-OFF]  50.55,81.53 0 top
H37  STAND-OFF  [STAND-OFF]  56.13,81.53 0 top
H38  STAND-OFF  [STAND-OFF]  73.91,81.53 0 top
H39  STAND-OFF  [STAND-OFF]  79.5,81.53 0 top
H40  STAND-OFF  [STAND-OFF]  97.28,81.53 0 top
H41  STAND-OFF  [STAND-OFF]  102.87,81.53 0 top
H42  STAND-OFF  [STAND-OFF]  120.65,81.53 0 top
H43  STAND-OFF  [STAND-OFF]  126.24,81.53 0 top
H44  STAND-OFF  [STAND-OFF]  144.02,81.53 0 top
H45  STAND-OFF  [STAND-OFF]  149.61,81.53 0 top
H46  STAND-OFF  [STAND-OFF]  167.39,81.53 0 top
H47  STAND-OFF  [STAND-OFF]  172.97,81.53 0 top
H48  STAND-OFF  [STAND-OFF]  190.75,81.53 0 top
H49  STAND-OFF  [STAND-OFF]  9.4,107.44 0 top
H50  STAND-OFF  [STAND-OFF]  27.18,107.44 0 top
H51  STAND-OFF  [STAND-OFF]  32.77,107.44 0 top
H52  STAND-OFF  [STAND-OFF]  50.55,107.44 0 top
H53  STAND-OFF  [STAND-OFF]  56.13,107.44 0 top
H54  STAND-OFF  [STAND-OFF]  73.91,107.44 0 top
H55  STAND-OFF  [STAND-OFF]  79.5,107.44 0 top
H56  STAND-OFF  [STAND-OFF]  97.28,107.44 0 top
H57  STAND-OFF  [STAND-OFF]  102.87,107.44 0 top
H58  STAND-OFF  [STAND-OFF]  120.65,107.44 0 top
H59  STAND-OFF  [STAND-OFF]  126.24,107.44 0 top
H60  STAND-OFF  [STAND-OFF]  144.02,107.44 0 top
H61  STAND-OFF  [STAND-OFF]  149.61,107.44 0 top
H62  STAND-OFF  [STAND-OFF]  167.39,107.44 0 top
H63  STAND-OFF  [STAND-OFF]  172.97,107.44 0 top
H64  STAND-OFF  [STAND-OFF]  190.75,107.44 0 top
H65  STAND-OFF  [STAND-OFF]  9.4,133.35 0 top
H66  STAND-OFF  [STAND-OFF]  27.18,133.35 0 top
H67  STAND-OFF  [STAND-OFF]  32.77,133.35 0 top
H68  STAND-OFF  [STAND-OFF]  50.55,133.35 0 top
H69  STAND-OFF  [STAND-OFF]  56.13,133.35 0 top
H70  STAND-OFF  [STAND-OFF]  73.91,133.35 0 top
H71  STAND-OFF  [STAND-OFF]  79.5,133.35 0 top
H72  STAND-OFF  [STAND-OFF]  97.28,133.35 0 top
H73  STAND-OFF  [STAND-OFF]  102.87,133.35 0 top
H74  STAND-OFF  [STAND-OFF]  120.65,133.35 0 top
H75  STAND-OFF  [STAND-OFF]  126.24,133.35 0 top
H76  STAND-OFF  [STAND-OFF]  144.02,133.35 0 top
H77  STAND-OFF  [STAND-OFF]  149.61,133.35 0 top
H78  STAND-OFF  [STAND-OFF]  167.39,133.35 0 top
H79  STAND-OFF  [STAND-OFF]  172.97,133.35 0 top
H80  STAND-OFF  [STAND-OFF]  190.75,133.35 0 top
J1  [1X09_NO_SILK]  8.13,8.13 0 top
J2  [1X09_NO_SILK]  31.5,8.13 0 top
J3  [1X09_NO_SILK]  54.86,8.13 0 top
J4  [1X09_NO_SILK]  78.23,8.13 0 top
J5  [1X09_NO_SILK]  101.6,8.13 0 top
J6  [1X09_NO_SILK]  124.97,8.13 0 top
J7  [1X09_NO_SILK]  148.34,8.13 0 top
J8  [1X09_NO_SILK]  171.7,8.13 0 top
J9  [1X09_NO_SILK]  8.13,34.04 0 top
J10  [1X09_NO_SILK]  31.5,34.04 0 top
J11  [1X09_NO_SILK]  54.86,34.04 0 top
J12  [1X09_NO_SILK]  78.23,34.04 0 top
J13  [1X09_NO_SILK]  101.6,34.04 0 top
J14  [1X09_NO_SILK]  124.97,34.04 0 top
J15  [1X09_NO_SILK]  148.34,34.04 0 top
J16  [1X09_NO_SILK]  171.7,34.04 0 top
J17  [1X09_NO_SILK]  8.13,59.94 0 top
J18  [1X09_NO_SILK]  31.5,59.94 0 top
J19  [1X09_NO_SILK]  54.86,59.94 0 top
J20  [1X09_NO_SILK]  78.23,59.94 0 top
J21  [1X09_NO_SILK]  101.6,59.94 0 top
J22  [1X09_NO_SILK]  124.97,59.94 0 top
J23  [1X09_NO_SILK]  148.34,59.94 0 top
J24  [1X09_NO_SILK]  171.7,59.94 0 top
J25  [1X09_NO_SILK]  8.13,85.85 0 top
J26  [1X09_NO_SILK]  31.5,85.85 0 top
J27  [1X09_NO_SILK]  54.86,85.85 0 top
J28  [1X09_NO_SILK]  78.23,85.85 0 top
J29  [1X09_NO_SILK]  101.6,85.85 0 top
J30  [1X09_NO_SILK]  124.97,85.85 0 top
J31  [1X09_NO_SILK]  148.34,85.85 0 top
J32  [1X09_NO_SILK]  171.7,85.85 0 top
J33  [1X09_NO_SILK]  8.13,111.76 0 top
J34  [1X09_NO_SILK]  31.5,111.76 0 top
J35  [1X09_NO_SILK]  54.86,111.76 0 top
J36  [1X09_NO_SILK]  78.23,111.76 0 top
J37  [1X09_NO_SILK]  101.6,111.76 0 top
J38  [1X09_NO_SILK]  124.97,111.76 0 top
J39  [1X09_NO_SILK]  148.34,111.76 0 top
J40  [1X09_NO_SILK]  171.7,111.76 0 top
JP1  JUMPER-SMT_3_1-NC_TRACE_SILK  [SMT-JUMPER_3_1-NC_TRACE_SILK]  17.78,20.22 270 bottom
JP2  JUMPER-SMT_3_1-NC_TRACE_SILK  [SMT-JUMPER_3_1-NC_TRACE_SILK]  15.24,20.22 90 bottom
JP3  JUMPER-SMT_3_1-NC_TRACE_SILK  [SMT-JUMPER_3_1-NC_TRACE_SILK]  25.4,20.22 270 bottom
JP4  JUMPER-SMT_3_1-NC_TRACE_SILK  [SMT-JUMPER_3_1-NC_TRACE_SILK]  22.86,20.22 90 bottom
JP5  JUMPER-SMT_2_NO_SILK  [SMT-JUMPER_2_NO_SILK]  18.19,16.38 270 bottom
JP6  JUMPER-SMT_2_NO_SILK  [SMT-JUMPER_2_NO_SILK]  15.65,16.38 270 bottom
JP7  JUMPER-SMT_2_NO_SILK  [SMT-JUMPER_2_NO_SILK]  25.81,16.38 270 bottom
JP8  JUMPER-SMT_2_NO_SILK  [SMT-JUMPER_2_NO_SILK]  23.27,16.38 270 bottom
JP9  JUMPER-SMT_2_NO_SILK  [SMT-JUMPER_2_NO_SILK]  12.73,19.56 90 bottom
JP10  JUMPER-SMT_2_NO_SILK  [SMT-JUMPER_2_NO_SILK]  28.32,19.58 90 bottom
JP11  JUMPER-SMT_3_1-NC_TRACE_SILK  [SMT-JUMPER_3_1-NC_TRACE_SILK]  41.15,20.22 270 bottom
JP12  JUMPER-SMT_2_NO_SILK  [SMT-JUMPER_2_NO_SILK]  51.69,19.58 90 bottom
JP13  JUMPER-SMT_3_1-NC_TRACE_SILK  [SMT-JUMPER_3_1-NC_TRACE_SILK]  38.61,20.22 90 bottom
JP14  JUMPER-SMT_3_1-NC_TRACE_SILK  [SMT-JUMPER_3_1-NC_TRACE_SILK]  48.77,20.22 270 bottom
JP15  JUMPER-SMT_3_1-NC_TRACE_SILK  [SMT-JUMPER_3_1-NC_TRACE_SILK]  46.23,20.22 90 bottom
JP16  JUMPER-SMT_2_NO_SILK  [SMT-JUMPER_2_NO_SILK]  41.55,16.38 270 bottom
JP17  JUMPER-SMT_2_NO_SILK  [SMT-JUMPER_2_NO_SILK]  39.01,16.38 270 bottom
JP18  JUMPER-SMT_2_NO_SILK  [SMT-JUMPER_2_NO_SILK]  49.17,16.38 270 bottom
JP19  JUMPER-SMT_2_NO_SILK  [SMT-JUMPER_2_NO_SILK]  46.63,16.38 270 bottom
JP20  JUMPER-SMT_2_NO_SILK  [SMT-JUMPER_2_NO_SILK]  36.09,19.56 90 bottom
JP21  JUMPER-SMT_3_1-NC_TRACE_SILK  [SMT-JUMPER_3_1-NC_TRACE_SILK]  64.52,20.22 270 bottom
JP22  JUMPER-SMT_2_NO_SILK  [SMT-JUMPER_2_NO_SILK]  75.06,19.58 90 bottom
JP23  JUMPER-SMT_3_1-NC_TRACE_SILK  [SMT-JUMPER_3_1-NC_TRACE_SILK]  61.98,20.22 90 bottom
JP24  JUMPER-SMT_3_1-NC_TRACE_SILK  [SMT-JUMPER_3_1-NC_TRACE_SILK]  72.14,20.22 270 bottom
JP25  JUMPER-SMT_3_1-NC_TRACE_SILK  [SMT-JUMPER_3_1-NC_TRACE_SILK]  69.6,20.22 90 bottom
JP26  JUMPER-SMT_2_NO_SILK  [SMT-JUMPER_2_NO_SILK]  64.92,16.38 270 bottom
JP27  JUMPER-SMT_2_NO_SILK  [SMT-JUMPER_2_NO_SILK]  62.38,16.38 270 bottom
JP28  JUMPER-SMT_2_NO_SILK  [SMT-JUMPER_2_NO_SILK]  72.54,16.38 270 bottom
JP29  JUMPER-SMT_2_NO_SILK  [SMT-JUMPER_2_NO_SILK]  70,16.38 270 bottom
JP30  JUMPER-SMT_2_NO_SILK  [SMT-JUMPER_2_NO_SILK]  59.46,19.56 90 bottom
JP31  JUMPER-SMT_3_1-NC_TRACE_SILK  [SMT-JUMPER_3_1-NC_TRACE_SILK]  87.88,20.22 270 bottom
JP32  JUMPER-SMT_2_NO_SILK  [SMT-JUMPER_2_NO_SILK]  98.42,19.58 90 bottom
JP33  JUMPER-SMT_3_1-NC_TRACE_SILK  [SMT-JUMPER_3_1-NC_TRACE_SILK]  85.34,20.22 90 bottom
JP34  JUMPER-SMT_3_1-NC_TRACE_SILK  [SMT-JUMPER_3_1-NC_TRACE_SILK]  95.5,20.22 270 bottom
JP35  JUMPER-SMT_3_1-NC_TRACE_SILK  [SMT-JUMPER_3_1-NC_TRACE_SILK]  92.96,20.22 90 bottom
JP36  JUMPER-SMT_2_NO_SILK  [SMT-JUMPER_2_NO_SILK]  88.29,16.38 270 bottom
JP37  JUMPER-SMT_2_NO_SILK  [SMT-JUMPER_2_NO_SILK]  85.75,16.38 270 bottom
JP38  JUMPER-SMT_2_NO_SILK  [SMT-JUMPER_2_NO_SILK]  95.91,16.38 270 bottom
JP39  JUMPER-SMT_2_NO_SILK  [SMT-JUMPER_2_NO_SILK]  93.37,16.38 270 bottom
JP40  JUMPER-SMT_2_NO_SILK  [SMT-JUMPER_2_NO_SILK]  82.83,19.56 90 bottom
JP41  JUMPER-SMT_3_1-NC_TRACE_SILK  [SMT-JUMPER_3_1-NC_TRACE_SILK]  111.25,20.22 270 bottom
JP42  JUMPER-SMT_2_NO_SILK  [SMT-JUMPER_2_NO_SILK]  121.79,19.58 90 bottom
JP43  JUMPER-SMT_3_1-NC_TRACE_SILK  [SMT-JUMPER_3_1-NC_TRACE_SILK]  108.71,20.22 90 bottom
JP44  JUMPER-SMT_3_1-NC_TRACE_SILK  [SMT-JUMPER_3_1-NC_TRACE_SILK]  118.87,20.22 270 bottom
JP45  JUMPER-SMT_3_1-NC_TRACE_SILK  [SMT-JUMPER_3_1-NC_TRACE_SILK]  116.33,20.22 90 bottom
JP46  JUMPER-SMT_2_NO_SILK  [SMT-JUMPER_2_NO_SILK]  111.66,16.38 270 bottom
JP47  JUMPER-SMT_2_NO_SILK  [SMT-JUMPER_2_NO_SILK]  109.12,16.38 270 bottom
JP48  JUMPER-SMT_2_NO_SILK  [SMT-JUMPER_2_NO_SILK]  119.28,16.38 270 bottom
JP49  JUMPER-SMT_2_NO_SILK  [SMT-JUMPER_2_NO_SILK]  116.74,16.38 270 bottom
JP50  JUMPER-SMT_2_NO_SILK  [SMT-JUMPER_2_NO_SILK]  106.2,19.56 90 bottom
JP51  JUMPER-SMT_3_1-NC_TRACE_SILK  [SMT-JUMPER_3_1-NC_TRACE_SILK]  134.62,20.22 270 bottom
JP52  JUMPER-SMT_2_NO_SILK  [SMT-JUMPER_2_NO_SILK]  145.16,19.58 90 bottom
JP53  JUMPER-SMT_3_1-NC_TRACE_SILK  [SMT-JUMPER_3_1-NC_TRACE_SILK]  132.08,20.22 90 bottom
JP54  JUMPER-SMT_3_1-NC_TRACE_SILK  [SMT-JUMPER_3_1-NC_TRACE_SILK]  142.24,20.22 270 bottom
JP55  JUMPER-SMT_3_1-NC_TRACE_SILK  [SMT-JUMPER_3_1-NC_TRACE_SILK]  139.7,20.22 90 bottom
JP56  JUMPER-SMT_2_NO_SILK  [SMT-JUMPER_2_NO_SILK]  135.03,16.38 270 bottom
JP57  JUMPER-SMT_2_NO_SILK  [SMT-JUMPER_2_NO_SILK]  132.49,16.38 270 bottom
JP58  JUMPER-SMT_2_NO_SILK  [SMT-JUMPER_2_NO_SILK]  142.65,16.38 270 bottom
JP59  JUMPER-SMT_2_NO_SILK  [SMT-JUMPER_2_NO_SILK]  140.11,16.38 270 bottom
JP60  JUMPER-SMT_2_NO_SILK  [SMT-JUMPER_2_NO_SILK]  129.57,19.56 90 bottom
JP61  JUMPER-SMT_3_1-NC_TRACE_SILK  [SMT-JUMPER_3_1-NC_TRACE_SILK]  157.99,20.22 270 bottom
JP62  JUMPER-SMT_2_NO_SILK  [SMT-JUMPER_2_NO_SILK]  168.53,19.58 90 bottom
JP63  JUMPER-SMT_3_1-NC_TRACE_SILK  [SMT-JUMPER_3_1-NC_TRACE_SILK]  155.45,20.22 90 bottom
JP64  JUMPER-SMT_3_1-NC_TRACE_SILK  [SMT-JUMPER_3_1-NC_TRACE_SILK]  165.61,20.22 270 bottom
JP65  JUMPER-SMT_3_1-NC_TRACE_SILK  [SMT-JUMPER_3_1-NC_TRACE_SILK]  163.07,20.22 90 bottom
JP66  JUMPER-SMT_2_NO_SILK  [SMT-JUMPER_2_NO_SILK]  158.39,16.38 270 bottom
JP67  JUMPER-SMT_2_NO_SILK  [SMT-JUMPER_2_NO_SILK]  155.85,16.38 270 bottom
JP68  JUMPER-SMT_2_NO_SILK  [SMT-JUMPER_2_NO_SILK]  166.01,16.38 270 bottom
JP69  JUMPER-SMT_2_NO_SILK  [SMT-JUMPER_2_NO_SILK]  163.47,16.38 270 bottom
JP70  JUMPER-SMT_2_NO_SILK  [SMT-JUMPER_2_NO_SILK]  152.93,19.56 90 bottom
JP71  JUMPER-SMT_3_1-NC_TRACE_SILK  [SMT-JUMPER_3_1-NC_TRACE_SILK]  181.36,20.22 270 bottom
JP72  JUMPER-SMT_2_NO_SILK  [SMT-JUMPER_2_NO_SILK]  191.9,19.58 90 bottom
JP73  JUMPER-SMT_3_1-NC_TRACE_SILK  [SMT-JUMPER_3_1-NC_TRACE_SILK]  178.82,20.22 90 bottom
JP74  JUMPER-SMT_3_1-NC_TRACE_SILK  [SMT-JUMPER_3_1-NC_TRACE_SILK]  188.98,20.22 270 bottom
JP75  JUMPER-SMT_3_1-NC_TRACE_SILK  [SMT-JUMPER_3_1-NC_TRACE_SILK]  186.44,20.22 90 bottom
JP76  JUMPER-SMT_2_NO_SILK  [SMT-JUMPER_2_NO_SILK]  181.76,16.38 270 bottom
JP77  JUMPER-SMT_2_NO_SILK  [SMT-JUMPER_2_NO_SILK]  179.22,16.38 270 bottom
JP78  JUMPER-SMT_2_NO_SILK  [SMT-JUMPER_2_NO_SILK]  189.38,16.38 270 bottom
JP79  JUMPER-SMT_2_NO_SILK  [SMT-JUMPER_2_NO_SILK]  186.84,16.38 270 bottom
JP80  JUMPER-SMT_2_NO_SILK  [SMT-JUMPER_2_NO_SILK]  176.3,19.56 90 bottom
JP81  JUMPER-SMT_3_1-NC_TRACE_SILK  [SMT-JUMPER_3_1-NC_TRACE_SILK]  17.78,46.13 270 bottom
JP82  JUMPER-SMT_2_NO_SILK  [SMT-JUMPER_2_NO_SILK]  28.32,45.49 90 bottom
JP83  JUMPER-SMT_3_1-NC_TRACE_SILK  [SMT-JUMPER_3_1-NC_TRACE_SILK]  15.24,46.13 90 bottom
JP84  JUMPER-SMT_3_1-NC_TRACE_SILK  [SMT-JUMPER_3_1-NC_TRACE_SILK]  25.4,46.13 270 bottom
JP85  JUMPER-SMT_3_1-NC_TRACE_SILK  [SMT-JUMPER_3_1-NC_TRACE_SILK]  22.86,46.13 90 bottom
JP86  JUMPER-SMT_2_NO_SILK  [SMT-JUMPER_2_NO_SILK]  18.19,42.29 270 bottom
JP87  JUMPER-SMT_2_NO_SILK  [SMT-JUMPER_2_NO_SILK]  15.65,42.29 270 bottom
JP88  JUMPER-SMT_2_NO_SILK  [SMT-JUMPER_2_NO_SILK]  25.81,42.29 270 bottom
JP89  JUMPER-SMT_2_NO_SILK  [SMT-JUMPER_2_NO_SILK]  23.27,42.29 270 bottom
JP90  JUMPER-SMT_2_NO_SILK  [SMT-JUMPER_2_NO_SILK]  12.73,45.47 90 bottom
JP91  JUMPER-SMT_3_1-NC_TRACE_SILK  [SMT-JUMPER_3_1-NC_TRACE_SILK]  41.15,46.13 270 bottom
JP92  JUMPER-SMT_2_NO_SILK  [SMT-JUMPER_2_NO_SILK]  51.69,45.49 90 bottom
JP93  JUMPER-SMT_3_1-NC_TRACE_SILK  [SMT-JUMPER_3_1-NC_TRACE_SILK]  38.61,46.13 90 bottom
JP94  JUMPER-SMT_3_1-NC_TRACE_SILK  [SMT-JUMPER_3_1-NC_TRACE_SILK]  48.77,46.13 270 bottom
JP95  JUMPER-SMT_3_1-NC_TRACE_SILK  [SMT-JUMPER_3_1-NC_TRACE_SILK]  46.23,46.13 90 bottom
JP96  JUMPER-SMT_2_NO_SILK  [SMT-JUMPER_2_NO_SILK]  41.55,42.29 270 bottom
JP97  JUMPER-SMT_2_NO_SILK  [SMT-JUMPER_2_NO_SILK]  39.01,42.29 270 bottom
JP98  JUMPER-SMT_2_NO_SILK  [SMT-JUMPER_2_NO_SILK]  49.17,42.29 270 bottom
JP99  JUMPER-SMT_2_NO_SILK  [SMT-JUMPER_2_NO_SILK]  46.63,42.29 270 bottom
JP100  JUMPER-SMT_2_NO_SILK  [SMT-JUMPER_2_NO_SILK]  36.09,45.47 90 bottom
JP101  JUMPER-SMT_3_1-NC_TRACE_SILK  [SMT-JUMPER_3_1-NC_TRACE_SILK]  64.52,46.13 270 bottom
JP102  JUMPER-SMT_2_NO_SILK  [SMT-JUMPER_2_NO_SILK]  75.06,45.49 90 bottom
JP103  JUMPER-SMT_3_1-NC_TRACE_SILK  [SMT-JUMPER_3_1-NC_TRACE_SILK]  61.98,46.13 90 bottom
JP104  JUMPER-SMT_3_1-NC_TRACE_SILK  [SMT-JUMPER_3_1-NC_TRACE_SILK]  72.14,46.13 270 bottom
JP105  JUMPER-SMT_3_1-NC_TRACE_SILK  [SMT-JUMPER_3_1-NC_TRACE_SILK]  69.6,46.13 90 bottom
JP106  JUMPER-SMT_2_NO_SILK  [SMT-JUMPER_2_NO_SILK]  64.92,42.29 270 bottom
JP107  JUMPER-SMT_2_NO_SILK  [SMT-JUMPER_2_NO_SILK]  62.38,42.29 270 bottom
JP108  JUMPER-SMT_2_NO_SILK  [SMT-JUMPER_2_NO_SILK]  72.54,42.29 270 bottom
JP109  JUMPER-SMT_2_NO_SILK  [SMT-JUMPER_2_NO_SILK]  70,42.29 270 bottom
JP110  JUMPER-SMT_2_NO_SILK  [SMT-JUMPER_2_NO_SILK]  59.46,45.47 90 bottom
JP111  JUMPER-SMT_3_1-NC_TRACE_SILK  [SMT-JUMPER_3_1-NC_TRACE_SILK]  87.88,46.13 270 bottom
JP112  JUMPER-SMT_2_NO_SILK  [SMT-JUMPER_2_NO_SILK]  98.42,45.49 90 bottom
JP113  JUMPER-SMT_3_1-NC_TRACE_SILK  [SMT-JUMPER_3_1-NC_TRACE_SILK]  85.34,46.13 90 bottom
JP114  JUMPER-SMT_3_1-NC_TRACE_SILK  [SMT-JUMPER_3_1-NC_TRACE_SILK]  95.5,46.13 270 bottom
JP115  JUMPER-SMT_3_1-NC_TRACE_SILK  [SMT-JUMPER_3_1-NC_TRACE_SILK]  92.96,46.13 90 bottom
JP116  JUMPER-SMT_2_NO_SILK  [SMT-JUMPER_2_NO_SILK]  88.29,42.29 270 bottom
JP117  JUMPER-SMT_2_NO_SILK  [SMT-JUMPER_2_NO_SILK]  85.75,42.29 270 bottom
JP118  JUMPER-SMT_2_NO_SILK  [SMT-JUMPER_2_NO_SILK]  95.91,42.29 270 bottom
JP119  JUMPER-SMT_2_NO_SILK  [SMT-JUMPER_2_NO_SILK]  93.37,42.29 270 bottom
JP120  JUMPER-SMT_2_NO_SILK  [SMT-JUMPER_2_NO_SILK]  82.83,45.47 90 bottom
JP121  JUMPER-SMT_3_1-NC_TRACE_SILK  [SMT-JUMPER_3_1-NC_TRACE_SILK]  111.25,46.13 270 bottom
JP122  JUMPER-SMT_2_NO_SILK  [SMT-JUMPER_2_NO_SILK]  121.79,45.49 90 bottom
JP123  JUMPER-SMT_3_1-NC_TRACE_SILK  [SMT-JUMPER_3_1-NC_TRACE_SILK]  108.71,46.13 90 bottom
JP124  JUMPER-SMT_3_1-NC_TRACE_SILK  [SMT-JUMPER_3_1-NC_TRACE_SILK]  118.87,46.13 270 bottom
JP125  JUMPER-SMT_3_1-NC_TRACE_SILK  [SMT-JUMPER_3_1-NC_TRACE_SILK]  116.33,46.13 90 bottom
JP126  JUMPER-SMT_2_NO_SILK  [SMT-JUMPER_2_NO_SILK]  111.66,42.29 270 bottom
JP127  JUMPER-SMT_2_NO_SILK  [SMT-JUMPER_2_NO_SILK]  109.12,42.29 270 bottom
JP128  JUMPER-SMT_2_NO_SILK  [SMT-JUMPER_2_NO_SILK]  119.28,42.29 270 bottom
JP129  JUMPER-SMT_2_NO_SILK  [SMT-JUMPER_2_NO_SILK]  116.74,42.29 270 bottom
JP130  JUMPER-SMT_2_NO_SILK  [SMT-JUMPER_2_NO_SILK]  106.2,45.47 90 bottom
JP131  JUMPER-SMT_3_1-NC_TRACE_SILK  [SMT-JUMPER_3_1-NC_TRACE_SILK]  134.62,46.13 270 bottom
JP132  JUMPER-SMT_2_NO_SILK  [SMT-JUMPER_2_NO_SILK]  145.16,45.49 90 bottom
JP133  JUMPER-SMT_3_1-NC_TRACE_SILK  [SMT-JUMPER_3_1-NC_TRACE_SILK]  132.08,46.13 90 bottom
JP134  JUMPER-SMT_3_1-NC_TRACE_SILK  [SMT-JUMPER_3_1-NC_TRACE_SILK]  142.24,46.13 270 bottom
JP135  JUMPER-SMT_3_1-NC_TRACE_SILK  [SMT-JUMPER_3_1-NC_TRACE_SILK]  139.7,46.13 90 bottom
JP136  JUMPER-SMT_2_NO_SILK  [SMT-JUMPER_2_NO_SILK]  135.03,42.29 270 bottom
JP137  JUMPER-SMT_2_NO_SILK  [SMT-JUMPER_2_NO_SILK]  132.49,42.29 270 bottom
JP138  JUMPER-SMT_2_NO_SILK  [SMT-JUMPER_2_NO_SILK]  142.65,42.29 270 bottom
JP139  JUMPER-SMT_2_NO_SILK  [SMT-JUMPER_2_NO_SILK]  140.11,42.29 270 bottom
JP140  JUMPER-SMT_2_NO_SILK  [SMT-JUMPER_2_NO_SILK]  129.57,45.47 90 bottom
JP141  JUMPER-SMT_3_1-NC_TRACE_SILK  [SMT-JUMPER_3_1-NC_TRACE_SILK]  157.99,46.13 270 bottom
JP142  JUMPER-SMT_2_NO_SILK  [SMT-JUMPER_2_NO_SILK]  168.53,45.49 90 bottom
JP143  JUMPER-SMT_3_1-NC_TRACE_SILK  [SMT-JUMPER_3_1-NC_TRACE_SILK]  155.45,46.13 90 bottom
JP144  JUMPER-SMT_3_1-NC_TRACE_SILK  [SMT-JUMPER_3_1-NC_TRACE_SILK]  165.61,46.13 270 bottom
JP145  JUMPER-SMT_3_1-NC_TRACE_SILK  [SMT-JUMPER_3_1-NC_TRACE_SILK]  163.07,46.13 90 bottom
JP146  JUMPER-SMT_2_NO_SILK  [SMT-JUMPER_2_NO_SILK]  158.39,42.29 270 bottom
JP147  JUMPER-SMT_2_NO_SILK  [SMT-JUMPER_2_NO_SILK]  155.85,42.29 270 bottom
JP148  JUMPER-SMT_2_NO_SILK  [SMT-JUMPER_2_NO_SILK]  166.01,42.29 270 bottom
JP149  JUMPER-SMT_2_NO_SILK  [SMT-JUMPER_2_NO_SILK]  163.47,42.29 270 bottom
JP150  JUMPER-SMT_2_NO_SILK  [SMT-JUMPER_2_NO_SILK]  152.93,45.47 90 bottom
JP151  JUMPER-SMT_3_1-NC_TRACE_SILK  [SMT-JUMPER_3_1-NC_TRACE_SILK]  181.36,46.13 270 bottom
JP152  JUMPER-SMT_2_NO_SILK  [SMT-JUMPER_2_NO_SILK]  191.9,45.49 90 bottom
JP153  JUMPER-SMT_3_1-NC_TRACE_SILK  [SMT-JUMPER_3_1-NC_TRACE_SILK]  178.82,46.13 90 bottom
JP154  JUMPER-SMT_3_1-NC_TRACE_SILK  [SMT-JUMPER_3_1-NC_TRACE_SILK]  188.98,46.13 270 bottom
JP155  JUMPER-SMT_3_1-NC_TRACE_SILK  [SMT-JUMPER_3_1-NC_TRACE_SILK]  186.44,46.13 90 bottom
JP156  JUMPER-SMT_2_NO_SILK  [SMT-JUMPER_2_NO_SILK]  181.76,42.29 270 bottom
JP157  JUMPER-SMT_2_NO_SILK  [SMT-JUMPER_2_NO_SILK]  179.22,42.29 270 bottom
JP158  JUMPER-SMT_2_NO_SILK  [SMT-JUMPER_2_NO_SILK]  189.38,42.29 270 bottom
JP159  JUMPER-SMT_2_NO_SILK  [SMT-JUMPER_2_NO_SILK]  186.84,42.29 270 bottom
JP160  JUMPER-SMT_2_NO_SILK  [SMT-JUMPER_2_NO_SILK]  176.3,45.47 90 bottom
JP161  JUMPER-SMT_3_1-NC_TRACE_SILK  [SMT-JUMPER_3_1-NC_TRACE_SILK]  17.78,72.03 270 bottom
JP162  JUMPER-SMT_2_NO_SILK  [SMT-JUMPER_2_NO_SILK]  28.32,71.4 90 bottom
JP163  JUMPER-SMT_3_1-NC_TRACE_SILK  [SMT-JUMPER_3_1-NC_TRACE_SILK]  15.24,72.03 90 bottom
JP164  JUMPER-SMT_3_1-NC_TRACE_SILK  [SMT-JUMPER_3_1-NC_TRACE_SILK]  25.4,72.03 270 bottom
JP165  JUMPER-SMT_3_1-NC_TRACE_SILK  [SMT-JUMPER_3_1-NC_TRACE_SILK]  22.86,72.03 90 bottom
JP166  JUMPER-SMT_2_NO_SILK  [SMT-JUMPER_2_NO_SILK]  18.19,68.2 270 bottom
JP167  JUMPER-SMT_2_NO_SILK  [SMT-JUMPER_2_NO_SILK]  15.65,68.2 270 bottom
JP168  JUMPER-SMT_2_NO_SILK  [SMT-JUMPER_2_NO_SILK]  25.81,68.2 270 bottom
JP169  JUMPER-SMT_2_NO_SILK  [SMT-JUMPER_2_NO_SILK]  23.27,68.2 270 bottom
JP170  JUMPER-SMT_2_NO_SILK  [SMT-JUMPER_2_NO_SILK]  12.73,71.37 90 bottom
JP171  JUMPER-SMT_3_1-NC_TRACE_SILK  [SMT-JUMPER_3_1-NC_TRACE_SILK]  41.15,72.03 270 bottom
JP172  JUMPER-SMT_2_NO_SILK  [SMT-JUMPER_2_NO_SILK]  51.69,71.4 90 bottom
JP173  JUMPER-SMT_3_1-NC_TRACE_SILK  [SMT-JUMPER_3_1-NC_TRACE_SILK]  38.61,72.03 90 bottom
JP174  JUMPER-SMT_3_1-NC_TRACE_SILK  [SMT-JUMPER_3_1-NC_TRACE_SILK]  48.77,72.03 270 bottom
JP175  JUMPER-SMT_3_1-NC_TRACE_SILK  [SMT-JUMPER_3_1-NC_TRACE_SILK]  46.23,72.03 90 bottom
JP176  JUMPER-SMT_2_NO_SILK  [SMT-JUMPER_2_NO_SILK]  41.55,68.2 270 bottom
JP177  JUMPER-SMT_2_NO_SILK  [SMT-JUMPER_2_NO_SILK]  39.01,68.2 270 bottom
JP178  JUMPER-SMT_2_NO_SILK  [SMT-JUMPER_2_NO_SILK]  49.17,68.2 270 bottom
JP179  JUMPER-SMT_2_NO_SILK  [SMT-JUMPER_2_NO_SILK]  46.63,68.2 270 bottom
JP180  JUMPER-SMT_2_NO_SILK  [SMT-JUMPER_2_NO_SILK]  36.09,71.37 90 bottom
JP181  JUMPER-SMT_3_1-NC_TRACE_SILK  [SMT-JUMPER_3_1-NC_TRACE_SILK]  64.52,72.03 270 bottom
JP182  JUMPER-SMT_2_NO_SILK  [SMT-JUMPER_2_NO_SILK]  75.06,71.4 90 bottom
JP183  JUMPER-SMT_3_1-NC_TRACE_SILK  [SMT-JUMPER_3_1-NC_TRACE_SILK]  61.98,72.03 90 bottom
JP184  JUMPER-SMT_3_1-NC_TRACE_SILK  [SMT-JUMPER_3_1-NC_TRACE_SILK]  72.14,72.03 270 bottom
JP185  JUMPER-SMT_3_1-NC_TRACE_SILK  [SMT-JUMPER_3_1-NC_TRACE_SILK]  69.6,72.03 90 bottom
JP186  JUMPER-SMT_2_NO_SILK  [SMT-JUMPER_2_NO_SILK]  64.92,68.2 270 bottom
JP187  JUMPER-SMT_2_NO_SILK  [SMT-JUMPER_2_NO_SILK]  62.38,68.2 270 bottom
JP188  JUMPER-SMT_2_NO_SILK  [SMT-JUMPER_2_NO_SILK]  72.54,68.2 270 bottom
JP189  JUMPER-SMT_2_NO_SILK  [SMT-JUMPER_2_NO_SILK]  70,68.2 270 bottom
JP190  JUMPER-SMT_2_NO_SILK  [SMT-JUMPER_2_NO_SILK]  59.46,71.37 90 bottom
JP191  JUMPER-SMT_3_1-NC_TRACE_SILK  [SMT-JUMPER_3_1-NC_TRACE_SILK]  87.88,72.03 270 bottom
JP192  JUMPER-SMT_2_NO_SILK  [SMT-JUMPER_2_NO_SILK]  98.42,71.4 90 bottom
JP193  JUMPER-SMT_3_1-NC_TRACE_SILK  [SMT-JUMPER_3_1-NC_TRACE_SILK]  85.34,72.03 90 bottom
JP194  JUMPER-SMT_3_1-NC_TRACE_SILK  [SMT-JUMPER_3_1-NC_TRACE_SILK]  95.5,72.03 270 bottom
JP195  JUMPER-SMT_3_1-NC_TRACE_SILK  [SMT-JUMPER_3_1-NC_TRACE_SILK]  92.96,72.03 90 bottom
JP196  JUMPER-SMT_2_NO_SILK  [SMT-JUMPER_2_NO_SILK]  88.29,68.2 270 bottom
JP197  JUMPER-SMT_2_NO_SILK  [SMT-JUMPER_2_NO_SILK]  85.75,68.2 270 bottom
JP198  JUMPER-SMT_2_NO_SILK  [SMT-JUMPER_2_NO_SILK]  95.91,68.2 270 bottom
JP199  JUMPER-SMT_2_NO_SILK  [SMT-JUMPER_2_NO_SILK]  93.37,68.2 270 bottom
JP200  JUMPER-SMT_2_NO_SILK  [SMT-JUMPER_2_NO_SILK]  82.83,71.37 90 bottom
JP201  JUMPER-SMT_3_1-NC_TRACE_SILK  [SMT-JUMPER_3_1-NC_TRACE_SILK]  111.25,72.03 270 bottom